# Altium PCB Image.PcbDoc
Units mil, origin at the board's own origin, x right, y up, seen from the top; angles counter-clockwise.
Board outline 1003.94 x 1003.94 mil, 6 copper layers (1 Top (Sig/Pwr), 2 (GND), 3 (Sig/Pwr), 4 (GND/Sig), 5 (GND), 6 Bottom (Sig/Pwr)), stack 68.504 mil thick; 53 components, 39 nets, 220 pads, 88 vias.
Unrouted connection lines stored in the file: 294.
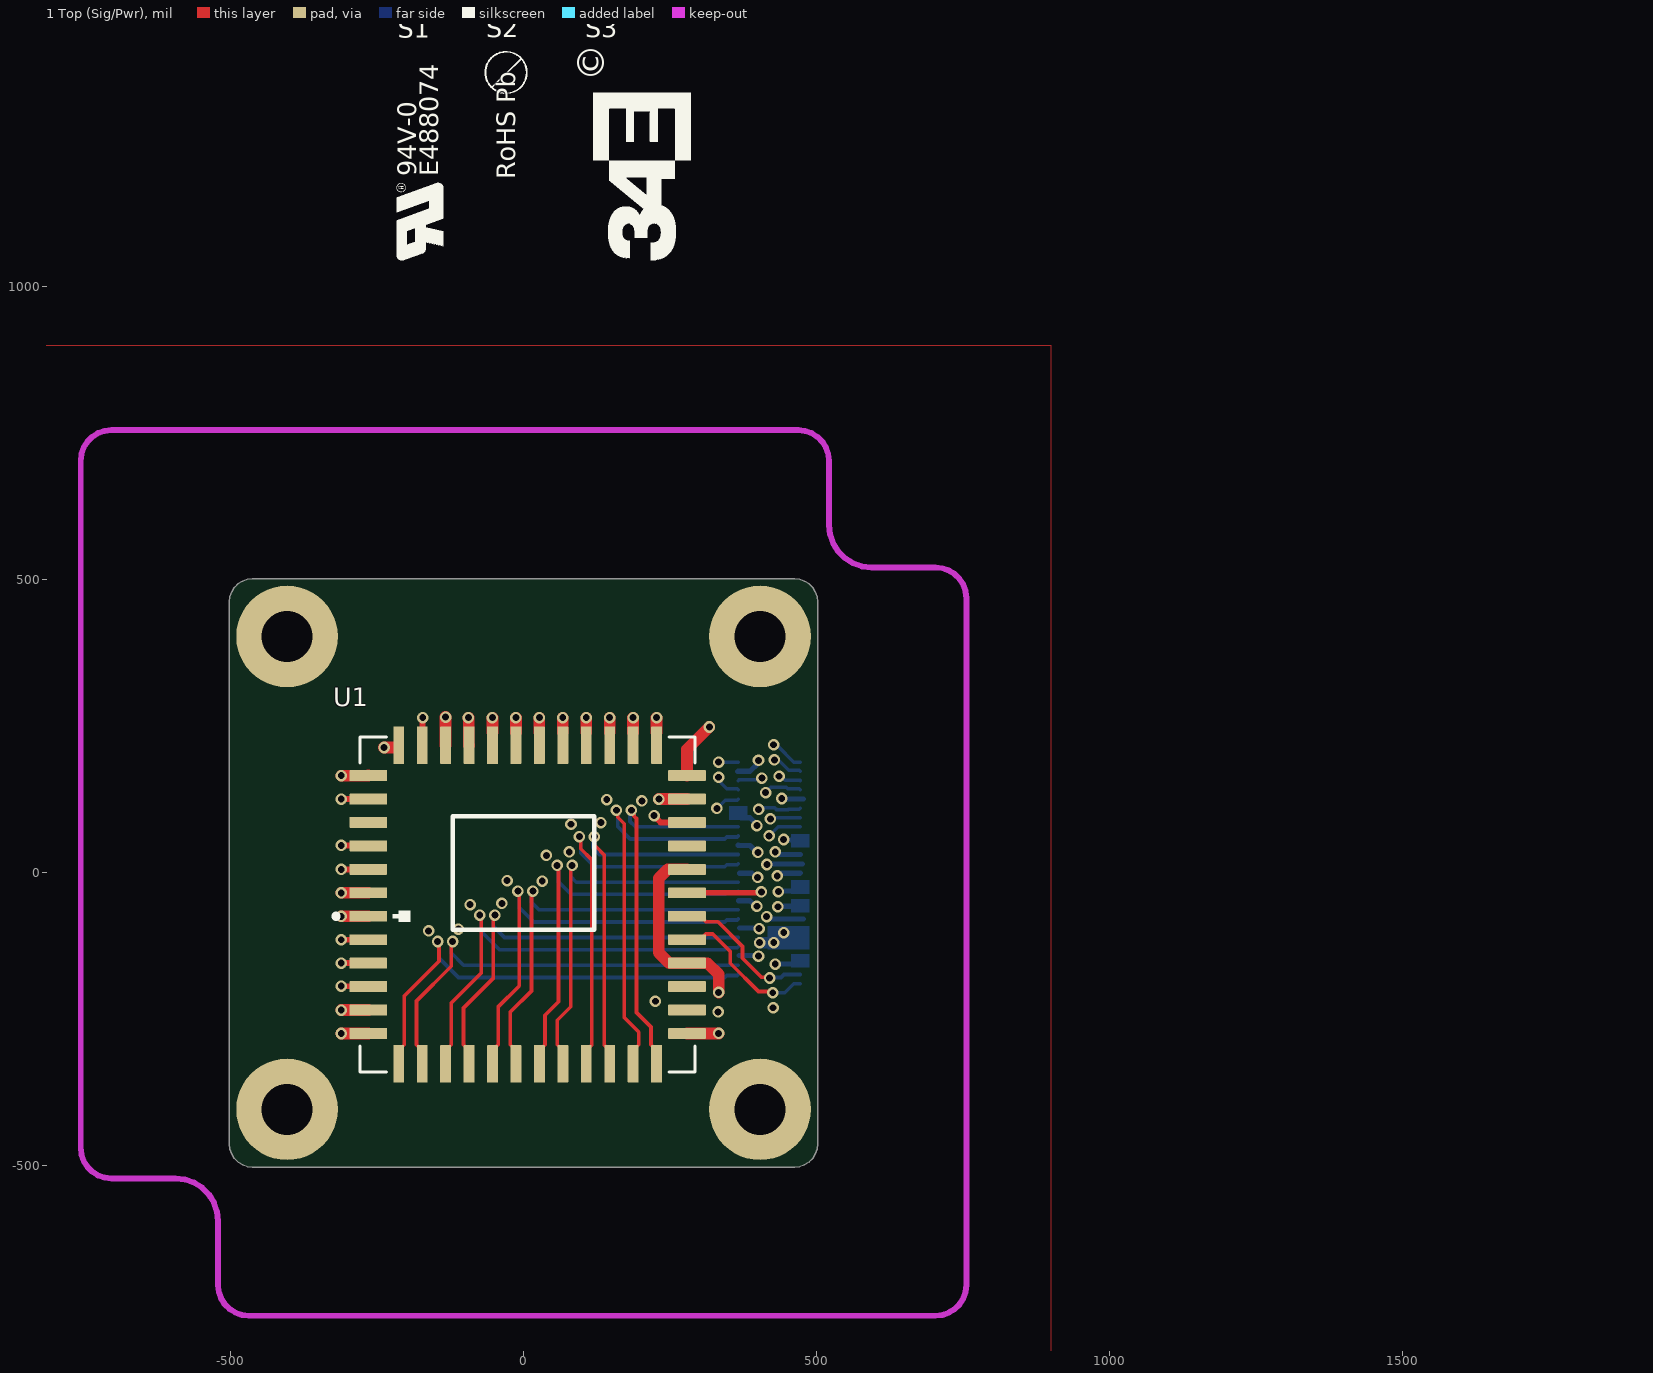
[diagram p0: 1 Top (Sig/Pwr) view]
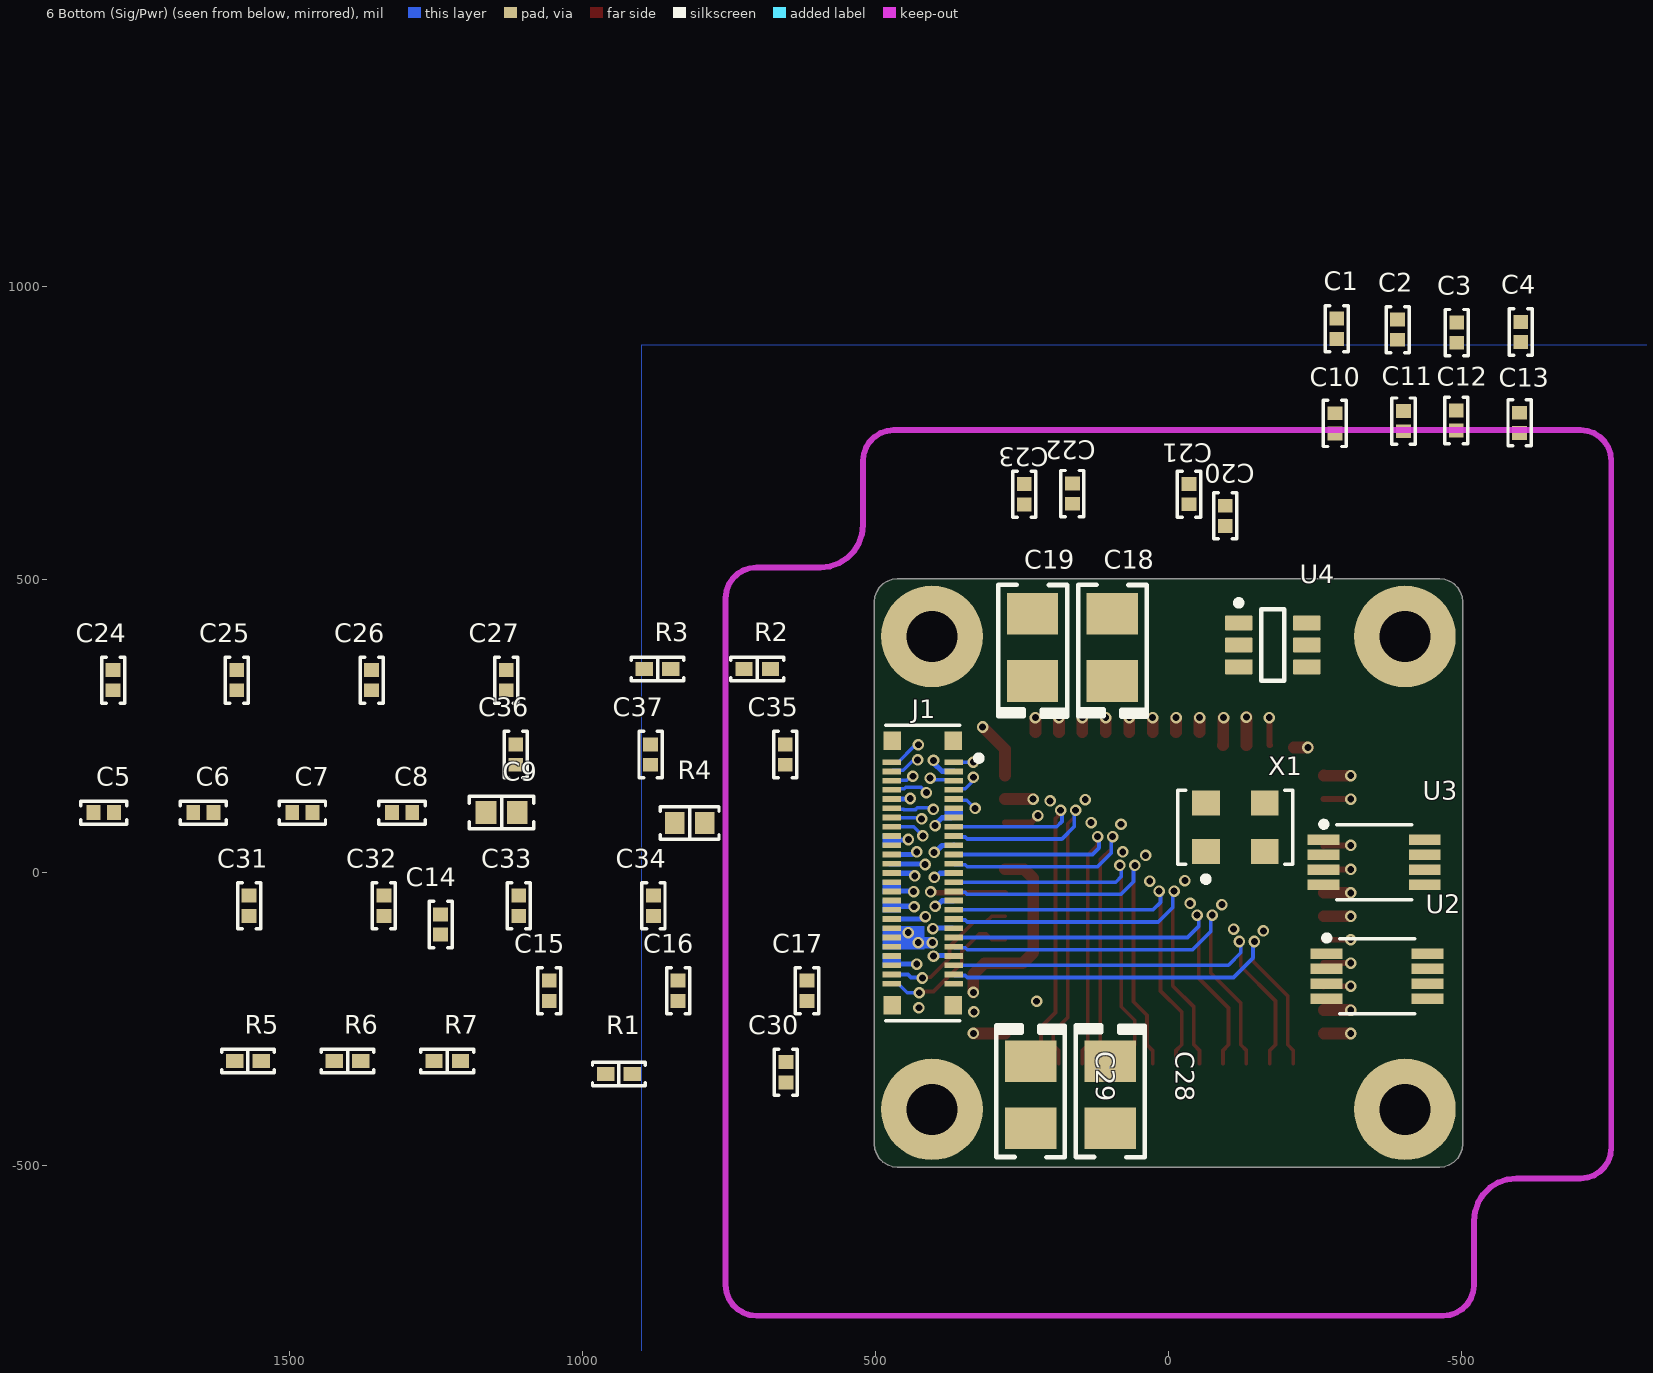
[diagram p1: 6 Bottom (Sig/Pwr) view, seen from below]
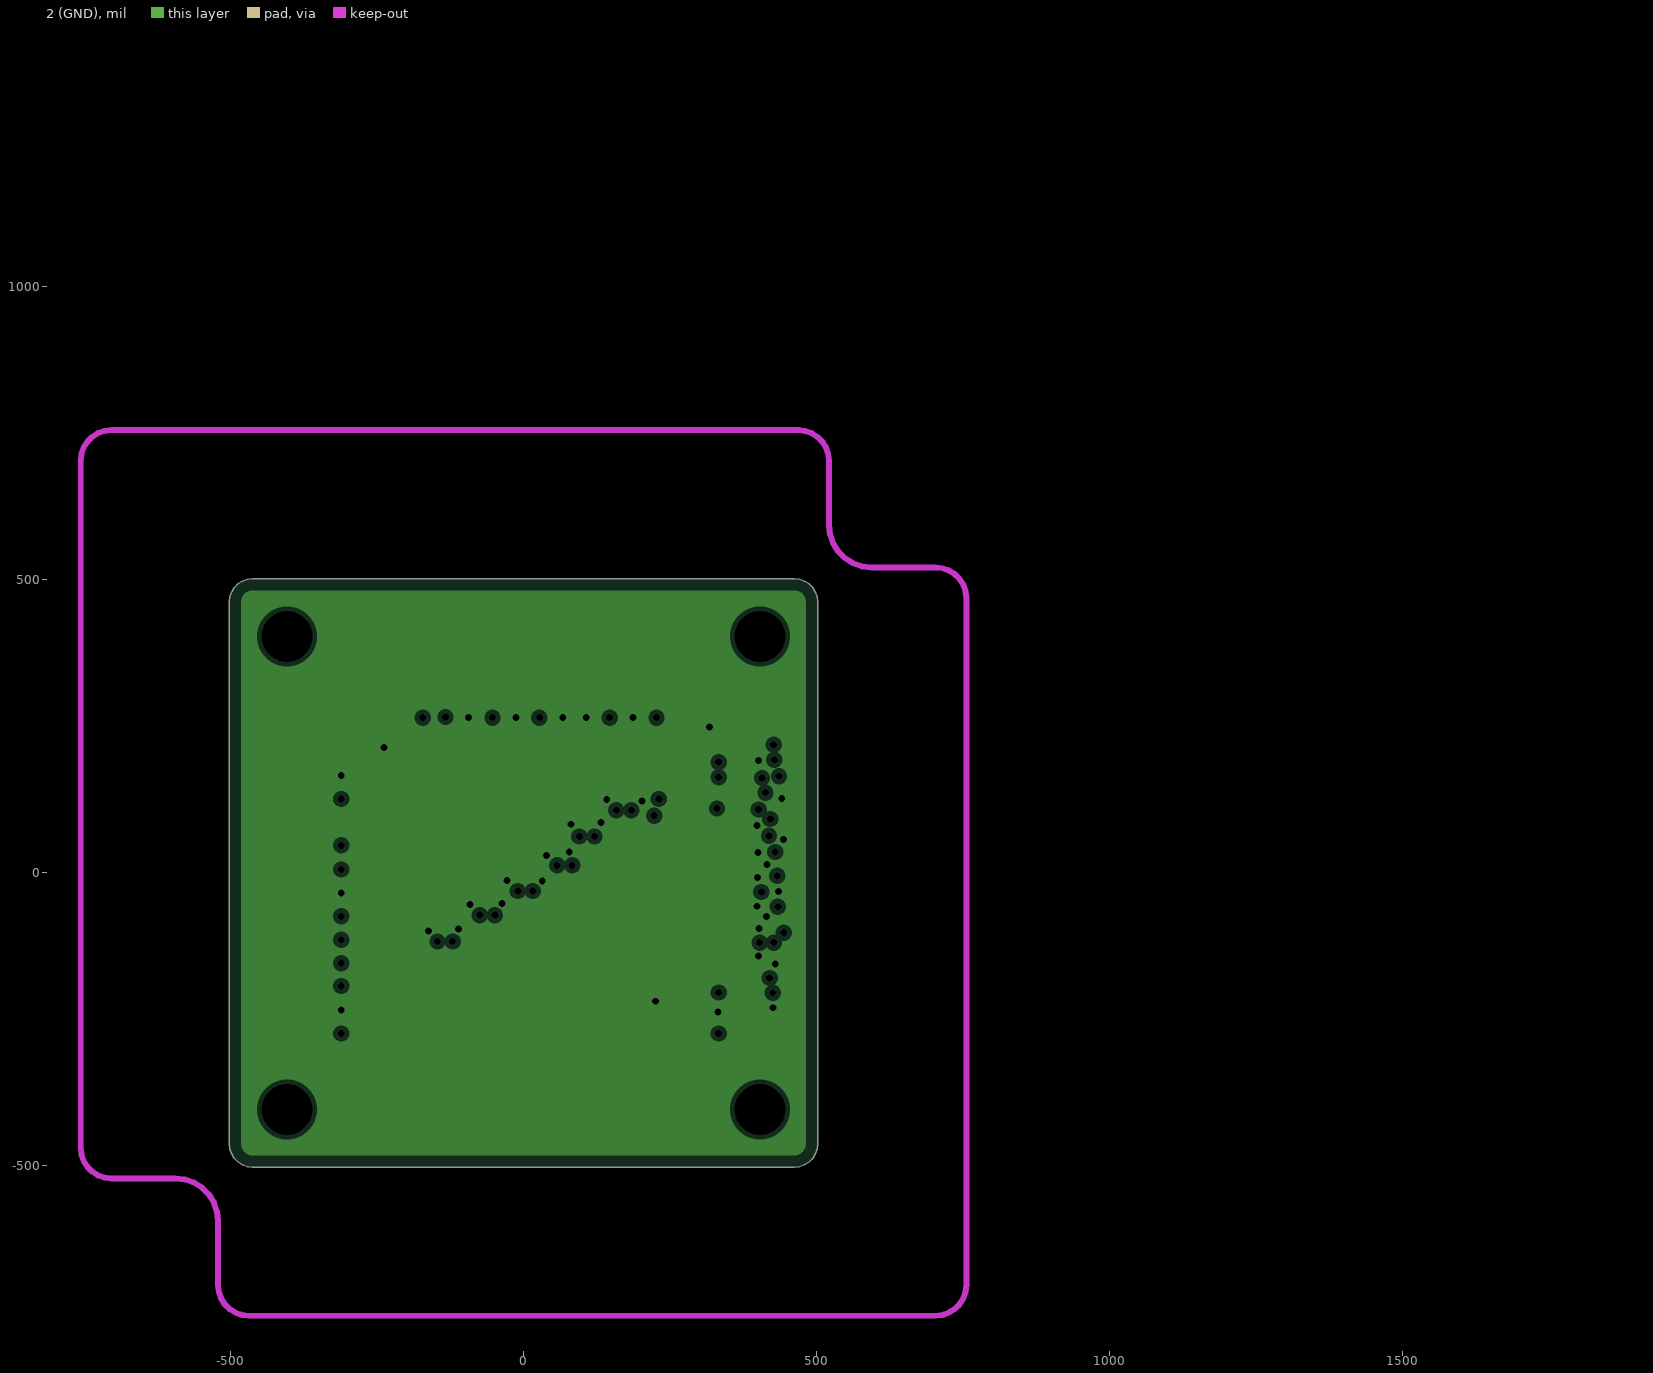
[diagram p2: 2 (GND), clearances drawn from the general rule]
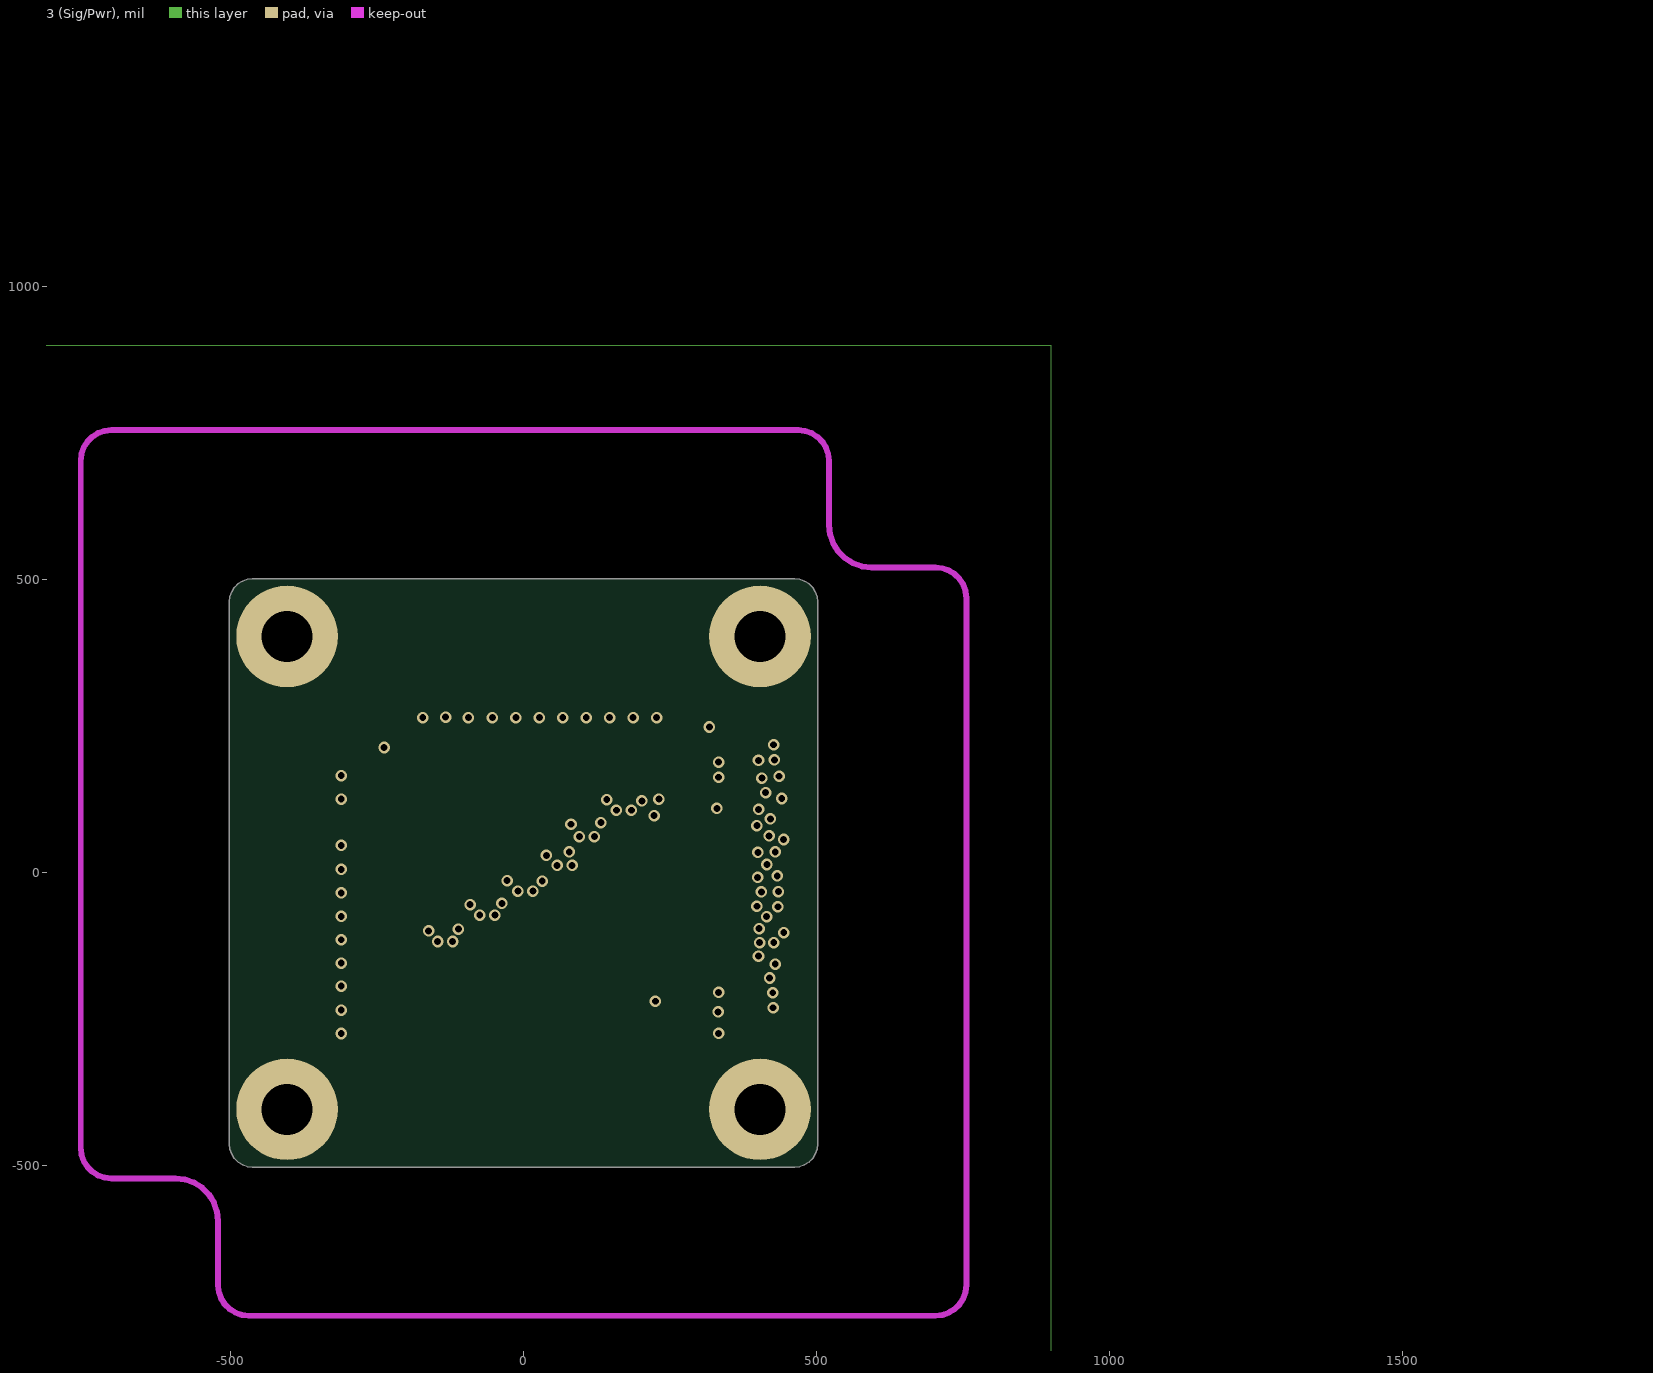
[diagram p3: 3 (Sig/Pwr)]
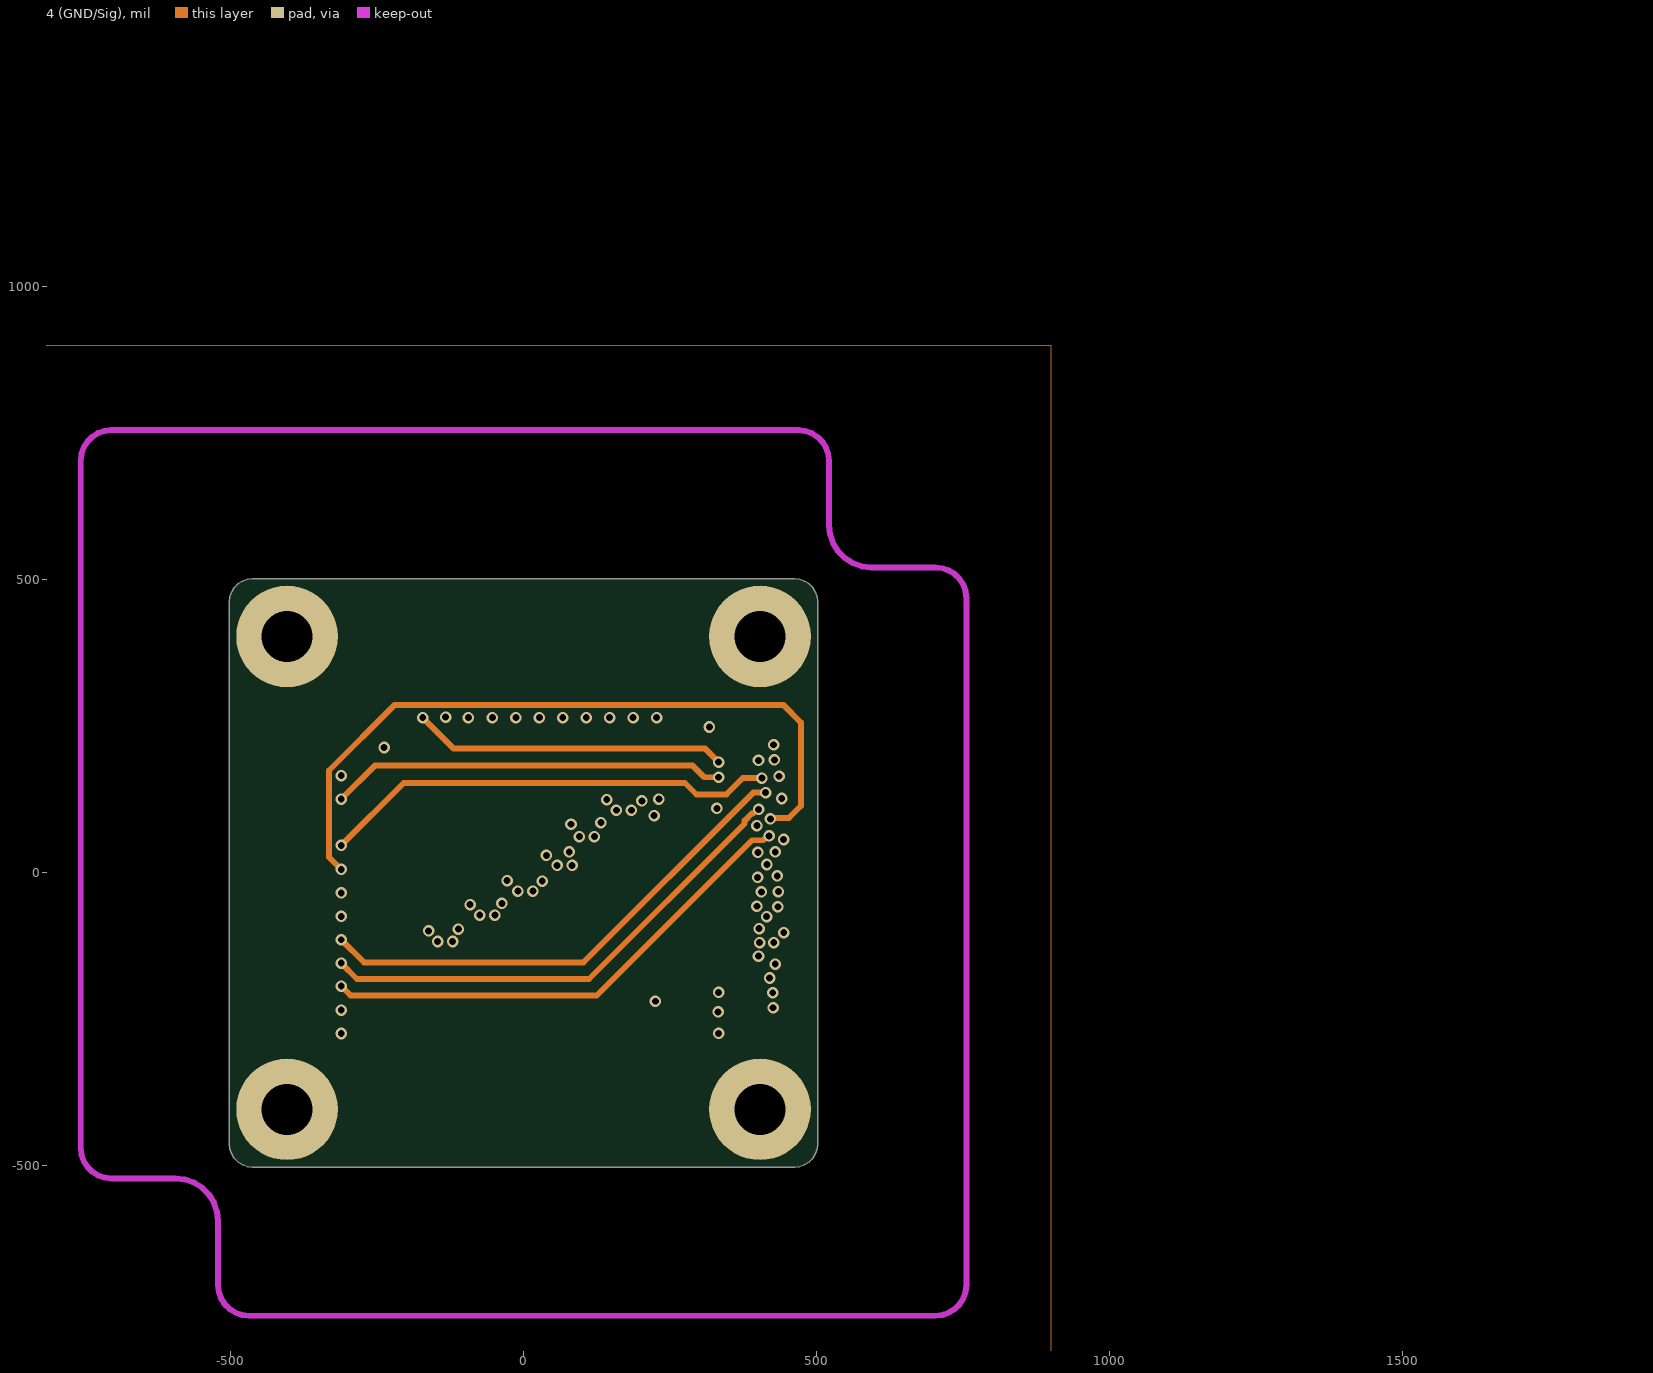
[diagram p4: 4 (GND/Sig)]
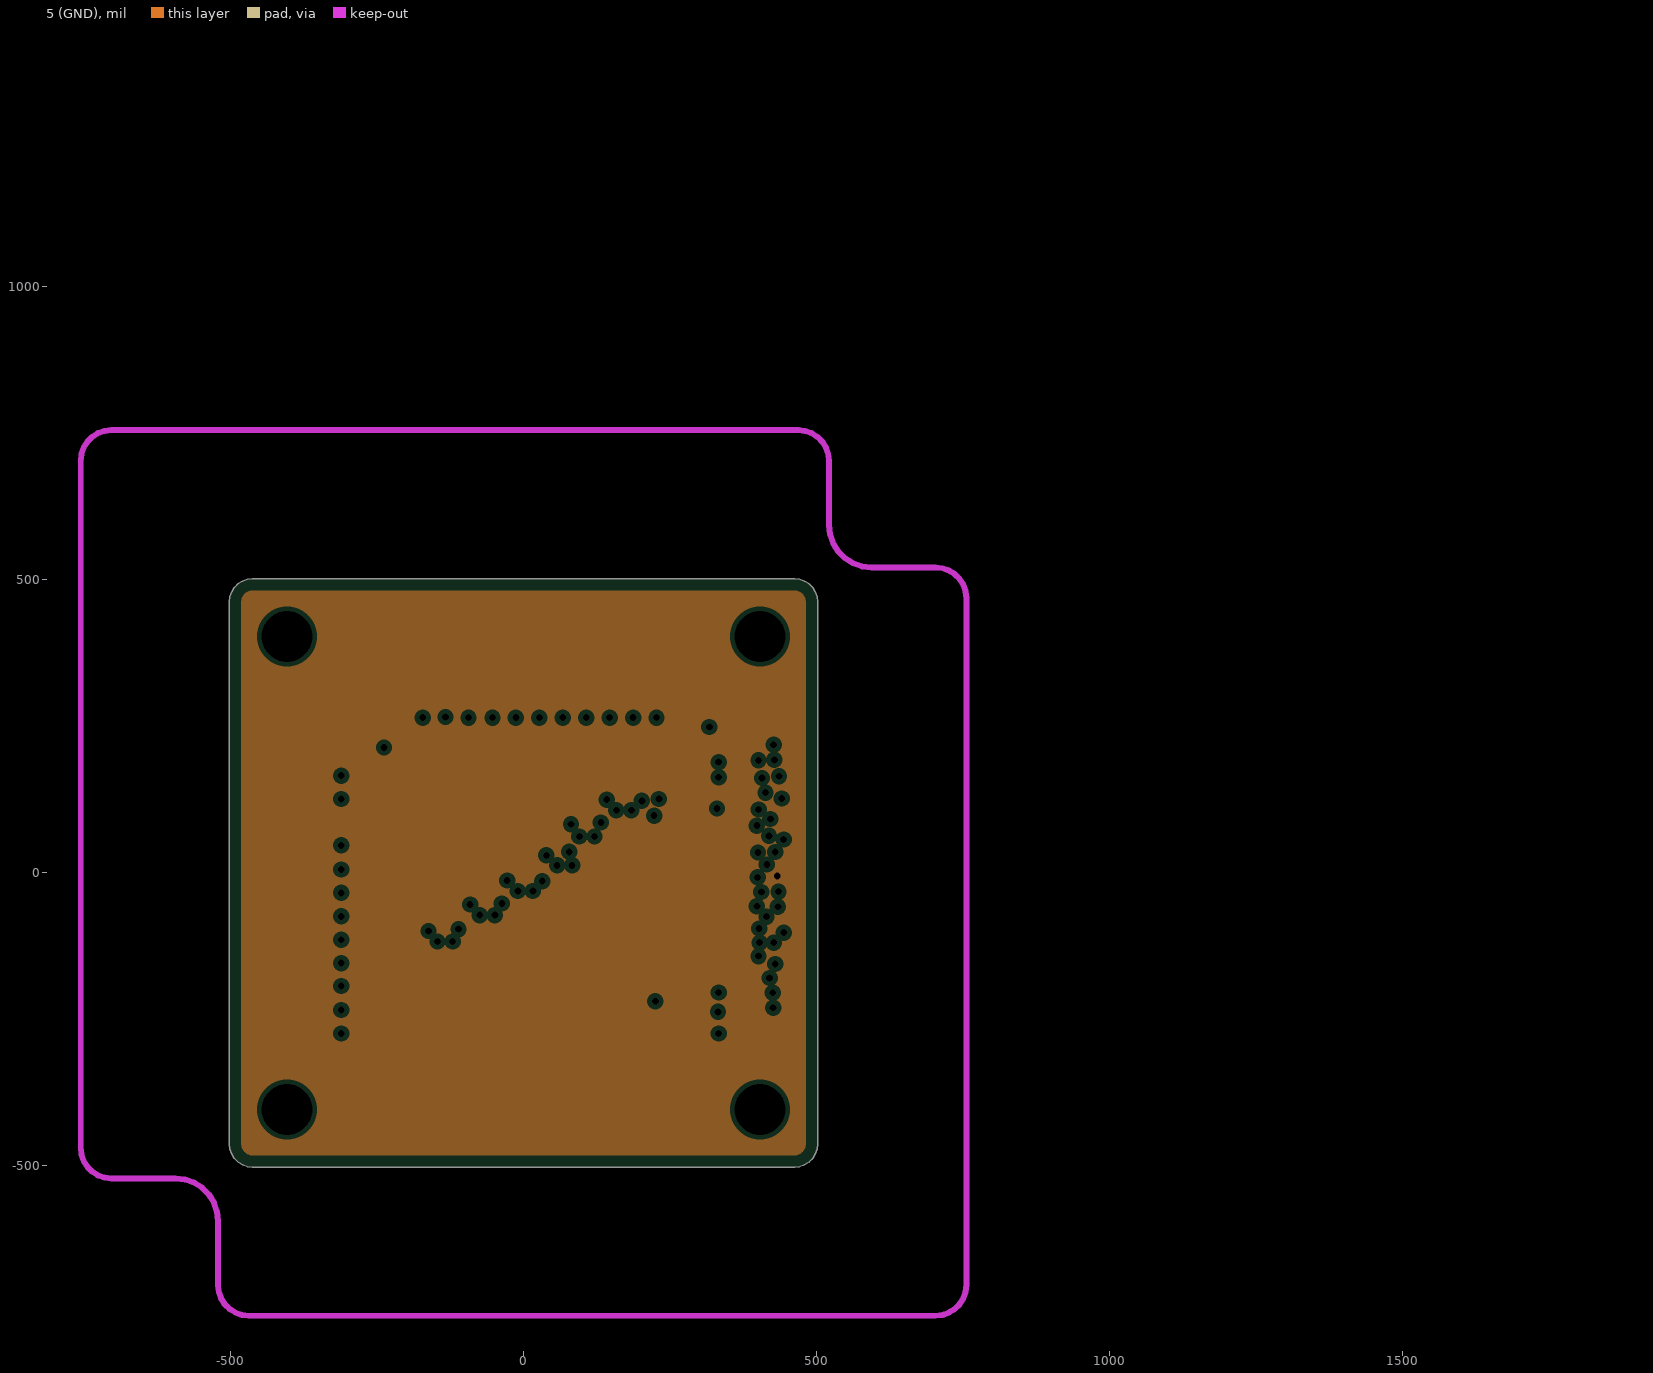
[diagram p5: 5 (GND), clearances drawn from the general rule]

## Layer stack, top to bottom
Top Solder: solder mask 1, SM-001, Dk 4
1 Top (Sig/Pwr): signal copper 1.378
Dielectric 1: prepreg 4.3307, PP-015, Dk 4.29
2 (GND): plane copper 1.378, net GND
Dielectric 2: core 23.622, Core-038, Dk 4.6
3 (Sig/Pwr): signal copper 1.378
Dielectric 3: prepreg 4.3307, PP-015, Dk 4.29
4 (GND/Sig): signal copper 1.378
Dielectric 4: core 23.622, Core-038, Dk 4.6
5 (GND): plane copper 1.378, net +3.3
Dielectric 5: prepreg 4.3307, PP-015, Dk 4.29
6 Bottom (Sig/Pwr): signal copper 1.378
Bottom Solder: solder mask 1, SM-001, Dk 4

## Board outline
462.6,-501.97 471.36,-500.98 479.68,-498.07 487.15,-493.38 493.38,-487.15 498.07,-479.68 500.98,-471.36 501.97,-462.6 501.97,462.6 500.98,471.36 498.07,479.68 493.38,487.15 487.15,493.38 479.68,498.07 471.36,500.98 462.6,501.97 -462.6,501.97 -471.36,500.98 -479.68,498.07 -487.15,493.38 -493.38,487.15 -498.07,479.68 -500.98,471.36 -501.97,462.6 -501.97,-462.6 -500.98,-471.36 -498.07,-479.68 -493.38,-487.15 -487.15,-493.38 -479.68,-498.07 -471.36,-500.98 -462.6,-501.97

## Design rules (kind name [scope] priority, off if disabled: settings)
BoardOutlineClearance BoardOutlineClearance_Polygon [IsPolygon] p1: gap=9.84 ignorepadtopadclearanceinfootprint=FALSE
Clearance [All] p1: gap=6 ignorepadtopadclearanceinfootprint=TRUE except(10: SMDPad-SMDPad)
DiffPairsRouting DiffPairsRouting_CAM [Not InDifferentialPair('USB')] p1: maxlimit=15.75 minlimit=5 mostfreqgap=14.58 toplayer_mingap=6 toplayer_minwidth=4 toplayer_maxwidth=6.3 toplayer_prefwidth=6 bottomlayer_mingap=6 bottomlayer_minwidth=4 bottomlayer_maxwidth=6.3 bottomlayer_prefwidth=6 impedanceprofiledriven=TRUE impedanceprofileid={367E0956-4617-40D2-A523-51326FB4A553} impedanceprofilevalue=100.000000 maxuncoupledlength=500
FanoutControl Fanout_BGA [IsBGA] p1: bgadir=NE bgaviamode=Centered fanoutstyle=BGA fanoutdirection=Alternating viagrid=1 // Fanout_BGA (Default Rule)
HoleSize [All] p1: absolutevalues=TRUE maxlimit=10000 minlimit=11.81 maxpercent=80.000 minpercent=20.000
HoleToHoleClearance HoleToHoleClearance_Via [IsVia] p1: gap=11 allowstackedmicrovias=TRUE
HoleToHoleClearance [Not IsVia] p2: gap=16 allowstackedmicrovias=TRUE
MinimumSolderMaskSliver [All] p1: minsoldermaskwidth=4
NetAntennae [Not InNet('ENC')] p1: netantennaetolerance=0
PlaneClearance [All] p1: clearance=8
PlaneConnect PlaneConnect_Thru [IsThruPin] p1: planeconnectstyle=Relief reliefexpansion=10 reliefentries=4 reliefconductorwidth=20 reliefairgap=10
PlaneConnect [All] p2: planeconnectstyle=Direct reliefexpansion=20 reliefentries=4 reliefconductorwidth=10 reliefairgap=10
PolygonConnect PolygonConnect_Thru [IsThruPin] p1: connectstyle=Relief reliefconductorwidth=20 reliefentries=4 polygonreliefangle="45 Angle" airgapwidth=10
PolygonConnect [All] p2: connectstyle=Direct reliefconductorwidth=10 reliefentries=4 polygonreliefangle="90 Angle" airgapwidth=10
RoutingVias [All] p1: holewidth=11.81 width=23.62 viastyle="Through Hole" minholewidth=5.91 minwidth=11.81 maxholewidth=39.37 maxwidth=78.74
SignalStimulus "Schematic Signal Stimulus_12" [InDifferentialPairClass('CAM_DOUT0')] p1: kind=1 level=1 starttime=0.000 stoptime=1.389n periodtime=2.778n
SignalStimulus "Schematic Signal Stimulus_11" [InDifferentialPairClass('CAM_CLKIN')] p2: kind=1 level=1 starttime=0.000 stoptime=1.389n periodtime=2.778n
SignalStimulus "Schematic Signal Stimulus_10" [InDifferentialPairClass('CAM_CLKOUT')] p3: kind=1 level=1 starttime=0.000 stoptime=1.389n periodtime=2.778n
SignalStimulus "Schematic Signal Stimulus_9" [InDifferentialPairClass('CAM_DOUT1')] p4: kind=1 level=1 starttime=0.000 stoptime=1.389n periodtime=2.778n
SignalStimulus "Schematic Signal Stimulus_8" [InDifferentialPairClass('CAM_SYNC')] p5: kind=1 level=1 starttime=0.000 stoptime=1.389n periodtime=2.778n
SignalStimulus "Schematic Signal Stimulus_7" [InDifferentialPairClass('CAM_DOUT2')] p6: kind=1 level=1 starttime=0.000 stoptime=1.389n periodtime=2.778n
SignalStimulus "Schematic Signal Stimulus_6" [InDifferentialPairClass('CAM_DOUT3')] p7: kind=1 level=1 starttime=0.000 stoptime=1.389n periodtime=2.778n
SilkToSilkClearance [All] p1: silktosilkclearance=0
SilkToSolderMaskClearance [IsPad] p1: minsilkscreentomaskgap=6 clearancetoexposedcopper=TRUE
SolderMaskExpansion SolderMaskExpansion_Via [Isvia] p1: expansion=2 istentingtop=TRUE
SolderMaskExpansion [Not Isvia] p2: expansion=2 istentingtop=FALSE
UnRoutedNet [Not InNet('ENC')] p1:
Width [All] p1: maxlimit=100 minlimit=6 preferedwidth=10
19 further rules are at their usual default settings.

## Classes and differential pairs
differential pair class CAM_CLKOUT: CAM_CLKOUT
differential pair class CAM_CLKIN: CAM_CLKIN
component class Image: C1 C2 C3 C4 C5 C6 C7 C8 C9 C10 C11 C12 C14 C16 C18 C19 C20 C24 C30 C32 C34 C35 C36 C37 J1 R2 R6 R7 S1 S2 S3 U1 U2 U3 U4 X1
differential pair class CAM_SYNC: CAM_SYNC
differential pair class CAM_DOUT3: CAM_DOUT3
differential pair class CAM_DOUT2: CAM_DOUT2
differential pair class CAM_DOUT1: CAM_DOUT1
differential pair class CAM_DOUT0: CAM_DOUT0
differential pair CAM_CLKOUT: +CAM_CLKOUT_P -CAM_CLKOUT_N
differential pair CAM_CLKIN: +CAM_CLKIN_P -CAM_CLKIN_N
differential pair CAM_SYNC: +CAM_SYNC_P -CAM_SYNC_N
differential pair CAM_DOUT3: +CAM_DOUT3_P -CAM_DOUT3_N
differential pair CAM_DOUT2: +CAM_DOUT2_P -CAM_DOUT2_N
differential pair CAM_DOUT1: +CAM_DOUT1_P -CAM_DOUT1_N
differential pair CAM_DOUT0: +CAM_DOUT0_P -CAM_DOUT0_N

## Components (designator, comment, footprint, x,y, rotation, side; value= is the part's Value field where it differs from the comment)
C1 "0.1µF" "CAP 0402_1005" -287,928.68 r90 bottom
C2 "0.1µF" "CAP 0402_1005" -391,927 r90 bottom
C3 "0.1µF" "CAP 0402_1005" -492,922 r90 bottom
C4 "0.1µF" "CAP 0402_1005" -601,923 r90 bottom
C5 "4.7µF" "CAP 0402_1005" 1816.81,103 r180 bottom
C6 "4.7µF" "CAP 0402_1005" 1646.81,103 r180 bottom
C7 "4.7µF" "CAP 0402_1005" 1477.81,103 r180 bottom
C8 "4.7µF" "CAP 0402_1005" 1307.81,103 r180 bottom
C9 "10µF" "CAP 0603_1608" 1137.81,103 r180 bottom
C10 "1µF" "CAP 0402_1005" -284,767 r90 bottom
C11 "1µF" "CAP 0402_1005" -401,771 r90 bottom
C12 "1µF" "CAP 0402_1005" -491,772 r90 bottom
C13 "1µF" "CAP 0402_1005" -599,768 r90 bottom
C14 "4.7µF" "CAP 0402_1005" 1242,-88 r90 bottom
C15 "4.7µF" "CAP 0402_1005" 1056.81,-201 r90 bottom
C16 "4.7µF" "CAP 0402_1005" 836.81,-201 r90 bottom
C17 "4.7µF" "CAP 0402_1005" 616.81,-201 r90 bottom
C18 "100µF" "CAP POL 1411_3528" 96,385 r90 bottom
C19 "100µF" "CAP POL 1411_3528" 232,385 r90 bottom
C20 "1µF" "CAP 0402_1005" -97,609.32 r270 bottom
C21 "1µF" "CAP 0402_1005" -35,646.32 r270 bottom
C22 "1µF" "CAP 0402_1005" 164,647.32 r270 bottom
C23 "1µF" "CAP 0402_1005" 245.92,646.11 r270 bottom
C24 "4.7µF" "CAP 0402_1005" 1800.81,329 r90 bottom
C25 "4.7µF" "CAP 0402_1005" 1589.81,329 r90 bottom
C26 "4.7µF" "CAP 0402_1005" 1359.81,329 r90 bottom
C27 "4.7µF" "CAP 0402_1005" 1129.81,329 r90 bottom
C28 "100µF" "CAP POL 1411_3528" 99,-378.48 r270 bottom
C29 "100µF" "CAP POL 1411_3528" 235,-378.52 r270 bottom
C30 "10nF" "CAP 0402_1005" 652.81,-340 r90 bottom value="10000 pF"
C31 "10µF" "CAP 0402_1005" 1568.81,-56 r90 bottom
C32 "10µF" "CAP 0402_1005" 1338.81,-56 r90 bottom
C33 "10µF" "CAP 0402_1005" 1108.81,-56 r90 bottom
C34 "10µF" "CAP 0402_1005" 878.81,-56 r90 bottom
C35 "0.1µF" "CAP 0402_1005" 653.81,202 r90 bottom
C36 "10nF" "CAP 0402_1005" 1113.81,202 r90 bottom value="10000 pF"
C37 "10nF" "CAP 0402_1005" 883.81,202 r90 bottom value="10000 pF"
J1 "2049270501" 2049270501 419.29,0 r0 top locked
R1 "100" "RES 0402_1005" 937.81,-343 r180 bottom
R2 "10k" "RES 0402_1005" 701.81,348 r180 bottom value="10 kOhms"
R3 "47k 1%" "RES 0402_1005" 871.81,348 r180 bottom value="47 kOhms"
R4 "0" "RES 0603_1608" 817,85 r180 bottom
R5 "100k" "RES 0402_1005" 1570.81,-321 r180 bottom value="100 kOhms"
R6 "100k" "RES 0402_1005" 1400.81,-321 r180 bottom value="100 kOhms"
R7 "100k" "RES 0402_1005" 1230.81,-321 r180 bottom value="100 kOhms"
S1 "" UL -179.81,1186 r90 top
S2 "" RoHS -29.81,1289 r90 top
S3 "" 34EngineeringLogo 298.19,1032 r90 top
U1 "NOIP1FN0300A-QDI" NOIP1FN0300A-QDI 7.09,-53.94 r90 top locked
U2 "NCP3335ADM330R2G" NCP3335ADM330R2G -356,-176 r180 bottom
U3 "NCP3335ADM330R2G" NCP3335ADM330R2G -351,18 r180 bottom
U4 "LM3880MF-1AB/NOPB" DBV0006A_M -177.93,389 r180 bottom
X1 "ASFLMB-72.000MHZ-XY-T" ASFLMB-72.000MHZ-XY-T -114,78 r180 bottom

## Footprints (in the part's own frame and the unit in brackets; to place one, negate y for a bottom-side part, rotate by r counter-clockwise, add the part's x,y. Pads: shape width x height; smd on the part's side, far side on the other; paste and mask are expansions set on the pad)
34EngineeringLogo [mil]
  silkscreen extent 13,13 299,179
2049270501 [mm]
  rect 0.81x0.25 smd far side paste+0 mask+0: 1(-1.345,4.8) 2(-1.345,4.4) 3(-1.345,4) 4(-1.345,3.6) 5(-1.345,3.2) 6(-1.345,2.8) 7(-1.345,2.4) 8(-1.345,2) 9(-1.345,1.6) 10(-1.345,1.2) 11(-1.345,0.8) 12(-1.345,0.4) 13(-1.345,0) 14(-1.345,-0.4) 15(-1.345,-0.8) 16(-1.345,-1.2) 17(-1.345,-1.6) 18(-1.345,-2) 19(-1.345,-2.4) 20(-1.345,-2.8) 21(-1.345,-3.2) 22(-1.345,-3.6) 23(-1.345,-4) 24(-1.345,-4.4) 25(-1.345,-4.8) 26(1.345,-4.8) 27(1.345,-4.4) 28(1.345,-4) 29(1.345,-3.6) 30(1.345,-3.2) 31(1.345,-2.8) 32(1.345,-2.4) 33(1.345,-2) 34(1.345,-1.6) 35(1.345,-1.2) 36(1.345,-0.8) 37(1.345,-0.4) 38(1.345,0) 39(1.345,0.4) 40(1.345,0.8) 41(1.345,1.2) 42(1.345,1.6) 43(1.345,2) 44(1.345,2.4) 45(1.345,2.8) 46(1.345,3.2) 47(1.345,3.6) 48(1.345,4) 49(1.345,4.4) 50(1.345,4.8)
  rect 0.77x0.8 smd far side paste+0 mask+0: MNT(-1.325,-5.73) MNT(-1.325,5.73) MNT(1.325,-5.73) MNT(1.325,5.73)
  body extent -1.59,-6.41 1.59,6.41
ASFLMB-72.000MHZ-XY-T [mm]
  rect 1.2x1.1 smd: 1(-1.27,-1.05) 2(1.27,-1.05) 3(1.27,1.05) 4(-1.27,1.05)
  silkscreen extent -2.5,-2.37 2.5,1.6, body extent -2.5,-1.6 2.5,1.6, height 0.84
"CAP 0402_1005" [mm] "Chip Capacitor, 2-Leads, Body 1.02x0.51mm, IPC Medium Density"
  rect 0.6x0.64 smd: 1(-0.44,0) 2(0.44,0)
  silkscreen extent -1,-0.5 1,0.5, body extent -0.5,-0.26 0.5,0.26, height 0.52
"CAP 0603_1608" [mm] "Chip Capacitor, 2-Leads, Body 1.60x0.80mm, IPC Medium Density"
  rect 0.9x1 smd: 1(-0.675,0) 2(0.675,0)
  silkscreen extent -1.4,-0.7 1.4,0.7, body extent -0.8,-0.41 0.8,0.41, height 0.82
"CAP POL 1411_3528" [mm] "Molded Capacitor, 2-Leads, Body 3.50x2.80mm, IPC Medium Density"
  rect 1.8x2.23 smd: 1(-1.46,0) 2(1.46,0)
  silkscreen extent -3,-1.5 2.71,1.48, body extent -1.87,-1.45 1.87,1.45, height 2
DBV0006A_M [mm] "SOT23, 6-Leads, Body 3.05x1.75mm, Pitch 0.95mm, IPC Low Density"
  rrect15% 1.2x0.65 smd: 1(-1.475,0.95) 2(-1.475,0) 3(-1.475,-0.95) 4(1.475,-0.95) 5(1.475,0) 6(1.475,0.95)
  silkscreen extent -1.6,-1.55 0.5,1.95, body extent -1.42,-1.46 1.42,1.46, height 1.11
NCP3335ADM330R2G [mil]
  rect 54.5x18 smd paste+0 mask+0: 1(-86.25,38.39) 2(-86.25,12.8) 3(-86.25,-12.8) 4(-86.25,-38.39) 5(86.25,-38.39) 6(86.25,-12.8) 7(86.25,12.8) 8(86.25,38.39)
  silkscreen extent -90,-64 64,69, body extent -99,-59 99,59, height 43
NOIP1FN0300A-QDI [mm]
  rrect12% 0.47x1.63 smd: 1(-0.508,6.905) 2(-1.524,6.905) 3(-2.54,6.905) 4(-3.556,6.905) 5(-4.572,6.905) 6(-5.588,6.905) 19(-5.588,-6.905) 20(-4.572,-6.905) 21(-3.556,-6.905) 22(-2.54,-6.905) 23(-1.524,-6.905) 24(-0.508,-6.905) 25(0.508,-6.905) 26(1.524,-6.905) 27(2.54,-6.905) 28(3.556,-6.905) 29(4.572,-6.905) 30(5.588,-6.905) 43(5.588,6.905) 44(4.572,6.905) 45(3.556,6.905) 46(2.54,6.905) 47(1.524,6.905) 48(0.508,6.905)
  rrect12% 1.63x0.47 smd: 7(-6.905,5.588) 8(-6.905,4.572) 9(-6.905,3.556) 10(-6.905,2.54) 11(-6.905,1.524) 12(-6.905,0.508) 13(-6.905,-0.508) 14(-6.905,-1.524) 15(-6.905,-2.54) 16(-6.905,-3.556) 17(-6.905,-4.572) 18(-6.905,-5.588) 31(6.905,-5.588) 32(6.905,-4.572) 33(6.905,-3.556) 34(6.905,-2.54) 35(6.905,-1.524) 36(6.905,-0.508) 37(6.905,0.508) 38(6.905,1.524) 39(6.905,2.54) 40(6.905,3.556) 41(6.905,4.572) 42(6.905,5.588)
  silkscreen extent -7.26,-7.26 7.26,8.41, body extent -7.11,-7.11 7.11,7.11, height 2.32
"RES 0402_1005" [mm] "Chip Resistor, 2-Leads, Body 1.0x0.5mm, IPC Medium Density"
  rect 0.75x0.6 smd: 1(-0.575,0) 2(0.575,0)
  silkscreen extent -1.14,-0.51 1.14,0.51, body extent -0.5,-0.25 0.5,0.25, height 0.35
"RES 0603_1608" [mm] "Chip Resistor, 2-Leads, Body 1.60x0.80mm, IPC Medium Density"
  rect 0.85x0.95 smd: 1(-0.65,0) 2(0.65,0)
  silkscreen extent -1.27,-0.7 1.27,0.7, body extent -0.8,-0.4 0.8,0.4, height 0.45
RoHS [mil]
  silkscreen extent 41,-35 112,35
UL [mil]
  silkscreen extent -141,-43 -9,37

## Part data
C1 C2 C3 C4 C35: library part 0402ZC104KAT2A, "CAP CER 0.1UF 10V X7R 0402", Device Package="0402 (1005 Metric)", Manufacturer="AVX Corporation", Operating Temperature="-55°C ~ 125°C", Supplier Part Number 1=478-7891-1-ND, Temperature Coefficient=X7R, Tolerance=±10%, Voltage - Rated=10V, Applications="General Purpose", Capacitance=0.1µF, ComponentLink1Description=Datasheet, ComponentLink1URL=http://datasheets.avx.com/X7RDielectric.pdf, ComponentLink2Description="DigiKey Link", ComponentLink2URL=http://digikey.com/product-detail/en/avx-corporation/0402ZC104KAT2A/478-7891-1-ND/3881514, lastupdated="2/8/2022 12:26:59 PM", Lifecycle Status=Active, Minimum Order=1, Mounting Type="Surface Mount, MLCC", Package / Case="0402 (1005 Metric)", Packaging=TapeAndReel, Part Number=0402ZC104KAT2A, Part Status=Active, partid=1757, price=0.09, Series=-, Size / Dimension="0.039\" L x 0.020\" W (1.00mm x 0.50mm)", Supplier 1=DigiKey, Thickness (Max)="0.022\" (0.55mm)"
C5 C6 C7 C8 C14 C15 C16 C17 C24 C25 C26 C27: library part 04026D475MAT2A, "CAP CER 4.7UF 6.3V X5R 0402", Device Package="0402 (1005 Metric)", Manufacturer="AVX Corporation", Operating Temperature="-55°C ~ 85°C", Supplier Part Number 1=478-10071-1-ND, Temperature Coefficient=X5R, Tolerance=±20%, Voltage - Rated=6.3V, Applications="General Purpose", Capacitance=4.7µF, ComponentLink1Description=Datasheet, ComponentLink1URL=http://datasheets.avx.com/cx5r.pdf, ComponentLink2Description="DigiKey Link", ComponentLink2URL=http://digikey.com/product-detail/en/avx-corporation/04026D475MAT2A/478-10071-1-ND/6564293, lastupdated="2/8/2022 12:26:39 PM", Lifecycle Status=Active, Minimum Order=1, Mounting Type="Surface Mount, MLCC", Package / Case="0402 (1005 Metric)", Packaging=TapeAndReel, Part Number=04026D475MAT2A, Part Status=Active, partid=12333, price=0.04, Series=-, Size / Dimension="0.039\" L x 0.020\" W (1.00mm x 0.50mm)", Supplier 1=DigiKey, Thickness (Max)="0.028\" (0.71mm)"
C9: library part CL10A106MQ8NNNC, "CAP CER 10UF 6.3V X5R 0603", Capacitance="10 µF", Device Package="0603 (1608 Metric)", Manufacturer="Samsung Electro-Mechanics", Operating Temperature="-55°C ~ 85°C", Supplier Part Number 1=1276-1119-1-ND, Temperature Coefficient=X5R, Tolerance=±20%, Voltage - Rated=6.3V, Applications="General Purpose", ComponentLink1Description=Datasheet, ComponentLink1URL=http://www.samsungsem.com/kr/support/product-search/mlcc/CL10A106MQ8NNNC.jsp, ComponentLink2Description="DigiKey Link", ComponentLink2URL=https://www.digikey.com/en/products/detail/samsung-electro-mechanics/CL10A106MQ8NNNC/3886777, lastupdated="7/15/2022 11:29:21 AM", Lifecycle Status=Active, Minimum Order=1, Mounting Type="Surface Mount, MLCC", Package / Case="0603 (1608 Metric)", Packaging=TapeAndReel, Part Number=CL10A106MQ8NNNC, Part Status=Active, partid=39822, price=0.01, Series=CL, Size / Dimension="0.063\" L x 0.031\" W (1.60mm x 0.80mm)", Supplier 1=DigiKey, Thickness (Max)="0.035\" (0.90mm)"
C10 C11 C12 C13 C20 C21 C22 C23: library part C0402C105K9PAC7800, "CAP CER 1UF 6.3V X5R 0402", Capacitance="1 µF", Device Package="0402 (1005 Metric)", Manufacturer=KEMET, Operating Temperature="-55°C ~ 85°C", Supplier Part Number 1=399-C0402C105K9PAC7800CT-ND, Temperature Coefficient=X5R, Tolerance=±10%, Voltage - Rated=6.3V, Applications="Bypass, Decoupling", ComponentLink1Description=Datasheet, ComponentLink1URL=https://api.kemet.com/component-edge/download/datasheet/C0402C105K9PACTU.pdf, ComponentLink2Description="DigiKey Link", ComponentLink2URL=https://www.digikey.com/en/products/detail/kemet/C0402C105K9PAC7800/1090778, lastupdated="7/15/2022 11:25:08 AM", Lifecycle Status=Active, Minimum Order=1, Mounting Type="Surface Mount, MLCC", Package / Case="0402 (1005 Metric)", Packaging=CutTape, Part Number=C0402C105K9PAC7800, Part Status=Active, partid=33394, price=0.01, Series="SMD Comm X5R", Size / Dimension="0.039\" L x 0.020\" W (1.00mm x 0.50mm)", Supplier 1=DigiKey, Thickness (Max)="0.022\" (0.55mm)"
C18 C19 C28 C29: library part TPSB107M010R0400, "CAP TANT 100UF 20% 10V 1411", ESR (Equivalent Series Resistance)=400mOhm, Manufacturer="AVX Corporation", Manufacturer Size Code=B, Operating Temperature="-55°C ~ 125°C", Package / Case="1411 (3528 Metric), 1210", Supplier Part Number 1=478-5231-1-ND, Tolerance=±20%, Voltage - Rated=10V, Capacitance=100µF, ComponentLink1Description=Datasheet, ComponentLink1URL=http://datasheets.avx.com/TPS.pdf, ComponentLink2Description="DigiKey Link", ComponentLink2URL=http://digikey.com/product-detail/en/avx-corporation/TPSB107M010R0400/478-5231-1-ND/1913301, Features="General Purpose", Height - Seated (Max)="0.083\" (2.10mm)", lastupdated="9/2/2020 1:15:46 AM", Lifecycle Status=Active, Minimum Order=1, Mounting Type="Surface Mount", Packaging=TapeAndReel, Part Number=TPSB107M010R0400, Part Status=Active, partid=84, price=0.31, Series=TPS, Size / Dimension="0.138\" L x 0.110\" W (3.50mm x 2.80mm)", Supplier 1=DigiKey, Type=Molded
C30 C36 C37: library part 0402B103K6R3CT, "CAP CER 10000PF 6.3V X7R 0402", Capacitance="10000 pF", Device Package="0402 (1005 Metric)", Manufacturer="Walsin Technology Corporation", Operating Temperature="-55°C ~ 125°C", Supplier Part Number 1=1292-1173-1-ND, Temperature Coefficient=X7R, Tolerance=±10%, Voltage - Rated=6.3V, Applications="General Purpose", ComponentLink1Description=Datasheet, ComponentLink1URL=http://www.passivecomponent.com/wp-content/uploads/2018/10/MLCC.pdf, ComponentLink2Description="DigiKey Link", ComponentLink2URL=https://www.digikey.com/en/products/detail/walsin-technology-corporation/0402B103K6R3CT/9354671, lastupdated="7/10/2022 8:59:10 AM", Lifecycle Status=Active, Minimum Order=1, Mounting Type="Surface Mount, MLCC", Package / Case="0402 (1005 Metric)", Packaging=CutTape, Part Number=0402B103K6R3CT, Part Status=Active, partid=11629, price=0.01, Series=-, Size / Dimension="0.039\" L x 0.020\" W (1.00mm x 0.50mm)", Supplier 1=DigiKey, Thickness (Max)="0.022\" (0.55mm)"
C31 C32 C33 C34: library part 0402ZD106MAT2A, "CAP CER 10UF 10V X5R 0402", Device Package="0402 (1005 Metric)", Manufacturer="AVX Corporation", Operating Temperature="-55°C ~ 85°C", Supplier Part Number 1=478-10052-1-ND, Temperature Coefficient=X5R, Tolerance=±20%, Voltage - Rated=10V, Applications="General Purpose", Capacitance=10µF, ComponentLink1Description=Datasheet, ComponentLink1URL=http://datasheets.avx.com/cx5r.pdf, ComponentLink2Description="DigiKey Link", ComponentLink2URL=http://digikey.com/product-detail/en/avx-corporation/0402ZD106MAT2A/478-10052-1-ND/6564275, lastupdated="2/8/2022 12:26:50 PM", Lifecycle Status=Active, Minimum Order=1, Mounting Type="Surface Mount, MLCC", Package / Case="0402 (1005 Metric)", Packaging=TapeAndReel, Part Number=0402ZD106MAT2A, Part Status=Active, partid=6854, price=0.24, Series=-, Size / Dimension="0.039\" L x 0.020\" W (1.00mm x 0.50mm)", Supplier 1=DigiKey, Thickness (Max)="0.028\" (0.71mm)"
J1: "SlimStack Board-to-Board Receptacle, 0.40mm Pitch, FSB3 Floating Series, 3.00mm Mated Height, 3.20mm Mated Width, 50...", Manufacturer=Molex, Manufacturer Part Number=203955-0503, Supplier Part Number 1=538-204927-0501, Pricing 1="1=3.72000, 10=3.28000, 50=3.28000, 100=2.61000, 1000=2.16000, 10000=2.01000 (USD)", RoHS=No, Stock 1=8587, Supplier 1=Mouser
R1: library part CRG0402F100R, "RES SMD 100 OHM 1% 1/16W 0402", Device Package="0402 (1005 Metric)", Manufacturer="TE Connectivity Passive Product", Operating Temperature="-55°C ~ 155°C", Power (Watts)="0.063W, 1/16W", Resistance="100 Ohms", Supplier Device Package=0402, Supplier Part Number 1=A121527CT-ND, Temperature Coefficient=±100ppm/°C, Tolerance=±1%, ComponentLink1Description=Datasheet, ComponentLink1URL=https://www.te.com/commerce/DocumentDelivery/DDEController?Action=srchrtrv&DocNm=1773204&DocType=DS&DocLang=English, ComponentLink2Description="DigiKey Link", ComponentLink2URL=https://www.digikey.com/en/products/detail/te-connectivity-passive-product/CRG0402F100R/2390484, Composition="Thick Film", Height - Seated (Max)="0.016\" (0.40mm)", lastupdated="7/15/2022 11:42:13 AM", Lifecycle Status=Active, Minimum Order=1, Number of Terminations=2, Package / Case="0402 (1005 Metric)", Packaging=CutTape, Part Number=CRG0402F100R, Part Status=Active, partid=20718, price=0.01, Series="CRG, Neohm", Size / Dimension="0.039\" L x 0.020\" W (1.00mm x 0.50mm)", Supplier 1=DigiKey
R2: library part MCS0402MC1002FE000, "RES SMD 10K OHM 1% 1/10W 0402", Device Package="0402 (1005 Metric)", Manufacturer="Vishay Beyschlag", Operating Temperature="-55°C ~ 175°C", Power (Watts)="0.1W, 1/10W", Ratings=AEC-Q200, Resistance="10 kOhms", Supplier Device Package=0402, Supplier Part Number 1=MCS0402-10.0K-MFCT-ND, Temperature Coefficient=±50ppm/°C, Tolerance=±1%, ComponentLink1Description=Datasheet, ComponentLink1URL=http://www.vishay.com/docs/28760/mcat_pro.pdf, ComponentLink2Description="DigiKey Link", ComponentLink2URL=http://digikey.com/product-detail/en/vishay-beyschlag/MCS0402MC1002FE000/MCS0402-10.0K-MFCT-ND/3883092, Composition="Thin Film", Features="Anti-Sulfur, Automotive AEC-Q200", Height - Seated (Max)="0.015\" (0.37mm)", lastupdated="7/10/2022 9:15:04 AM", Lifecycle Status=Active, Minimum Order=1, Number of Terminations=2, Package / Case="0402 (1005 Metric)", Packaging=TapeAndReel, Part Number=MCS0402MC1002FE000, Part Status=Active, partid=3152, price=0.03, Series="MCS AT - Professional", Size / Dimension="0.039\" L x 0.020\" W (1.00mm x 0.50mm)", Supplier 1=DigiKey
R3: library part RMCF0402FT47K0, "RES 47K OHM 1% 1/16W 0402", Device Package="0402 (1005 Metric)", Manufacturer="Stackpole Electronics Inc", Operating Temperature="-55°C ~ 155°C", Power (Watts)="0.063W, 1/16W", Ratings=AEC-Q200, Resistance="47 kOhms", Supplier Device Package=0402, Supplier Part Number 1=RMCF0402FT47K0CT-ND, Temperature Coefficient=±100ppm/°C, Tolerance=±1%, ComponentLink1Description=Datasheet, ComponentLink1URL=https://www.seielect.com/catalog/sei-rmcf_rmcp.pdf, ComponentLink2Description="DigiKey Link", ComponentLink2URL=https://www.digikey.com/en/products/detail/stackpole-electronics-inc/RMCF0402FT47K0/1714749, Composition="Thick Film", Features="Automotive AEC-Q200", Height - Seated (Max)="0.016\" (0.40mm)", lastupdated="7/10/2022 9:14:59 AM", Lifecycle Status=Active, Minimum Order=1, Number of Terminations=2, Package / Case="0402 (1005 Metric)", Packaging=CutTape, Part Number=RMCF0402FT47K0, Part Status=Active, partid=4957, price=0.01, Series=RMCF, Size / Dimension="0.039\" L x 0.020\" W (1.00mm x 0.50mm)", Supplier 1=DigiKey
R4: library part CRCW06030000Z0EAHP, "RES SMD 0 OHM JUMPER 1/3W 0603", Device Package="0603 (1608 Metric)", Manufacturer="Vishay Dale", Operating Temperature="-55°C ~ 155°C", Power (Watts)="0.333W, 1/3W", Ratings=AEC-Q200, Resistance="0 Ohms", Supplier Device Package=0603, Supplier Part Number 1=541-0.0SBCT-ND, Tolerance=Jumper, ComponentLink1Description=Datasheet, ComponentLink1URL=http://www.vishay.com/docs/20043/crcwhpe3.pdf, ComponentLink2Description="DigiKey Link", ComponentLink2URL=https://www.digikey.com/en/products/detail/vishay-dale/CRCW06030000Z0EAHP/2222231, Composition="Thick Film", Features="Automotive AEC-Q200, Pulse Withstanding", Height - Seated (Max)="0.022\" (0.55mm)", lastupdated="7/15/2022 11:50:24 AM", Lifecycle Status=Active, Minimum Order=1, Number of Terminations=2, Package / Case="0603 (1608 Metric)", Packaging=TapeAndReel, Part Number=CRCW06030000Z0EAHP, Part Status=Active, partid=5474, price=0.01, Series=CRCW-HP, Size / Dimension="0.063\" L x 0.033\" W (1.60mm x 0.85mm)", Supplier 1=DigiKey
R5 R6 R7: library part MCS04020C1003FE000, "RES SMD 100K OHM 1% 1/10W 0402", Device Package="0402 (1005 Metric)", Manufacturer="Vishay Beyschlag", Operating Temperature="-55°C ~ 155°C", Power (Watts)="0.1W, 1/10W", Resistance="100 kOhms", Supplier Device Package=0402, Supplier Part Number 1=MCS0402-100K-CFCT-ND, Temperature Coefficient=±50ppm/°C, Tolerance=±1%, ComponentLink1Description=Datasheet, ComponentLink1URL=http://www.vishay.com/docs/28705/mcx0x0xpro.pdf, ComponentLink2Description="DigiKey Link", ComponentLink2URL=http://digikey.com/product-detail/en/vishay-beyschlag/MCS04020C1003FE000/MCS0402-100K-CFCT-ND/2607930, Composition="Thin Film", Features=Anti-Sulfur, Height - Seated (Max)="0.015\" (0.37mm)", lastupdated="7/10/2022 9:15:04 AM", Lifecycle Status=Active, Minimum Order=1, Number of Terminations=2, Package / Case="0402 (1005 Metric)", Packaging=TapeAndReel, Part Number=MCS04020C1003FE000, Part Status=Active, partid=3149, price=0.03, Series="MCS - Professional", Size / Dimension="0.039\" L x 0.020\" W (1.00mm x 0.50mm)", Supplier 1=DigiKey
S1: library part UL
S2: library part RoHS
S3: library part 34EngineeringLogo, "34 Engineering Silkscreen Logo"
U1: "IC IMAGE SENSOR 0.3MP 48LCC", Case/Package=LCC, Manufacturer="ON Semiconductor", Max Operating Temperature=85°C, Min Operating Temperature=-40°C, Operating Supply Voltage=3.4V, Category=Optoelectronics, ComponentLink1Description=http://www.onsemi.com/pub_link/Collateral/PB_NOIP1SN1300A-D.PDF?src-supplier=Digi-Key, ComponentLink1URL=http://www.onsemi.com/pub_link/Collateral/PB_NOIP1SN1300A-D.PDF?src-supplier=Digi-Key, ComponentLink2Description=http://www.onsemi.com/pub_link/Collateral/NOIP1SN1300A-D.PDF?src-supplier=Avnet+Asia, ComponentLink2URL=http://www.onsemi.com/pub_link/Collateral/NOIP1SN1300A-D.PDF?src-supplier=Avnet+Asia, Lead Free="Lead Free", Manufacturer Part Number=NOIP1FN0300A-QDI, Mount="Surface Mount", Number of Pins=48, Pricing 1="6=58.23675, 8=57.37875, 20=56.62800, 30=55.87725, 60=55.12650, 300=53.83950, 600=53.41050 (USD)", RoHS=Yes, RoHS Compliant=Yes, Supplier 1=Avnet, Supplier Part Number 1=NOIP1FN0300A-QDI
U2 U3: "Linear Voltage Regulator, LDO, Ultra High Accuracy, Low Iq, 500 mA, V out : 3.3 V", Case/Package=MSOP, Dropout Voltage=340mV, Manufacturer="ON Semiconductor", Max Input Voltage=16V, Max Operating Temperature=150°C, Max Output Current=800mA, Min Input Voltage=2.6V, Min Operating Temperature=-40°C, Min Output Voltage=3.3V, Output Voltage Accuracy=0.9%, Package Quantity=4000, Reference Voltage=1.269V, Accuracy=0.9%, Category="Voltage Regulators - Linear", ComponentLink1Description=https://datasheet.ciiva.com/30476/0900766b8124f876-30476966.pdf?src-supplier=RSComponents, ComponentLink1URL=https://datasheet.ciiva.com/30476/0900766b8124f876-30476966.pdf?src-supplier=RSComponents, ComponentLink2Description=https://datasheet.ciiva.com/2061/ncp3335a-d-2061837.pdf?src-supplier=Digi-Key, ComponentLink2URL=https://datasheet.ciiva.com/2061/ncp3335a-d-2061837.pdf?src-supplier=Digi-Key, ComponentLink3Description=https://datasheet.ciiva.com/2061/ncp3335a-d-2061838.pdf?src-supplier=Digi-Key, ComponentLink3URL=https://datasheet.ciiva.com/2061/ncp3335a-d-2061838.pdf?src-supplier=Digi-Key, ComponentLink4Description=https://datasheet.ciiva.com/16390/ncp3335a-d-16390281.pdf?src-supplier=Future+Electronics, ComponentLink4URL=https://datasheet.ciiva.com/16390/ncp3335a-d-16390281.pdf?src-supplier=Future+Electronics, Halogen Free="Halogen Free", Height=0.95mm, Lead Free="Lead Free", Length=3.1mm, Manufacturer Part Number=NCP3335ADM330R2G, Mount="Surface Mount", Number of Outputs=1, Number of Pins=8, Number of Regulators=1, Output Current=800mA, Output Type=Fixed, Output Voltage=3.3V, Packaging="Tape and Reel", Polarity=Positive, Pricing 1="1=1.27050, 10=1.10060, 25=0.93500, 100=0.82150, 250=0.81330, 500=0.66300, 1000=0.61180, 3000=0.57730 (USD)", Radiation Hardening=No, RoHS=Yes, RoHS Compliant=Yes, Stock 1=3509, Supplier 1="Arrow Electronics", Supplier Part Number 1=NCP3335ADM330R2G, Width=3.1mm
U4: library part CMP-0063-01011-4, "Power Sequencer, 6-pin SOT-23, Pb-Free, 1000 Reel", Manufacturer="Texas Instruments", PackageTopMarking=F21A*XTT, PowerWise=N, Code_IPC=SOT26A-6, Code_JEDEC=MO-178-AB, ComponentLink1Description="Datasheet URL", ComponentLink1URL=http://www.ti.com/general/docs/lit/getliterature.tsp?genericPartNumber=LM3880&fileType=pdf, CompType=MiscPower, High-Reliability=Y, PackageDescription="Molded SOT-23, .115 x .063 x .040in Body, 6 Lead, .0375in in Pitch", PackageReference=DBV0006A, PartNumber=LM3880MF-1AB/NOPB, PinCount=6, RoHS=Y
X1: "Silicon Oscillator 72MHz 15pF ±10ppm 4-Pin QFN T/R", Case/Package=SMD/SMT, Frequency=72MHz, Frequency Stability=10ppm, Load Capacitance=15pF, Manufacturer=Abracon, Max Operating Temperature=105°C, Max Supply Current=16mA, Min Operating Temperature=-40°C, Operating Supply Voltage=3.6V, Supplier Part Number 1=815-ASFLMB-72-XY-T, Category=Oscillators, ComponentLink1Description=https://datasheet.ciiva.com/870/memspeedproflyerii-870042.pdf?src-supplier=Digi-Key, ComponentLink1URL=https://datasheet.ciiva.com/870/memspeedproflyerii-870042.pdf?src-supplier=Digi-Key, ComponentLink2Description=https://datasheet.ciiva.com/870/memspeedproflyerii-870043.pdf?src-supplier=Digi-Key, ComponentLink2URL=https://datasheet.ciiva.com/870/memspeedproflyerii-870043.pdf?src-supplier=Digi-Key, ComponentLink3Description=https://datasheet.ciiva.com/870/memspeedproflyerii-870044.pdf?src-supplier=Digi-Key, ComponentLink3URL=https://datasheet.ciiva.com/870/memspeedproflyerii-870044.pdf?src-supplier=Digi-Key, ComponentLink4Description=https://datasheet.ciiva.com/3178/asflmb-3178058.pdf?src-supplier=Avnet, ComponentLink4URL=https://datasheet.ciiva.com/3178/asflmb-3178058.pdf?src-supplier=Avnet, ComponentLink5Description=https://datasheet.ciiva.com/13163/asflmb-24525-13163049.pdf?src-supplier=Mouser, ComponentLink5URL=https://datasheet.ciiva.com/13163/asflmb-24525-13163049.pdf?src-supplier=Mouser, Height=0.035inch, Length=0.197inch, Manufacturer Part Number=ASFLMB-72.000MHZ-XY-T, Mount="Surface Mount", Number of Pins=4, Packaging="Tape and Reel", Pricing 1="1=3.61000, 10=3.45000, 50=3.27000, 100=2.93000, 500=2.76000, 1000=2.40000, 10000=2.40000 (USD)", Radiation Hardening=No, RoHS=Yes, Series="Pure Silicon™ ASFLMB", Stock 1=318, Supplier 1=Mouser, Termination=SMD/SMT, Width=0.126inch

## Free pads (board coordinates)
  round 173.23 hole 86.61: 1(-403.54,-403.54) 1(-403.54,403.54) 1(403.54,-403.54) 1(403.54,403.54)

## Via types
v1: diameter 19.68, hole 11.81, 1 Top (Sig/Pwr) to 6 Bottom (Sig/Pwr), tented both sides, 88 vias

## Nets (pads, with @x,y where several pads share a name; then routed paths per layer and width w, separated by ;. In a path a pad name is that pad's centre, name@x,y a point inside that pad or via, vN(x,y) a via of type N, cw(c..) or ccw(c..) an arc to the next point about the centre after c; other vN are vias at no path point)
1.8V_PG: J1.50 U4.3 | length 57.8
  6 Bottom (Sig/Pwr) w6: v1(426.78,218.66) 429.4,216.04 434.16,216.04 461.22,188.98 J1.50
+1.8: C1.2 C2.2 C3.2 C4.2 C5.2 C6.2 C7.2 C8.2 C9.2 J1.40 U1.6 U1.22 U1.26 | length 420.4
  1 Top (Sig/Pwr) w20: v1(-311,-274) -264.83,-274 U1.6 ; U1.26 246.06,6.06 230.85,-9.15 230.85,-135.85 248.94,-153.94 313.94,-153.94 333,-173 v1(333,-204)
  6 Bottom (Sig/Pwr) w9: v1(429.51,35.76) 432.4,35.76 436.66,31.5 J1.40
+3.3: C30.2 J1.38 R5.2 R6.2 R7.2 X1.4 | length 41.3
  6 Bottom (Sig/Pwr) w9: v1(433,-5) 437.67,-0.33 471.92,-0.33 J1.38
+5: C31.2 C33.2 C35.2 J1.34 J1.35 U2.7 U2.8 U3.7 U3.8 U4.1 | length 34.1
  6 Bottom (Sig/Pwr) w10: v1(433.97,-57.66) 434.87,-56.77 465.23,-56.77 467,-55
+12_CAB: J1.30 J1.31 J1.32 | length 24
  6 Bottom (Sig/Pwr) w20: v1(403,-119) v1(427,-119)
  other v1: 444,-102
CAM_ANA: C10.2 C11.2 C12.2 C13.2 C14.2 C15.2 C16.2 C17.2 C18.1 C19.1 C32.2 U1.1 U1.19 U1.29 U1.36 U2.1 U2.2 U2.3 | length 173.4
  1 Top (Sig/Pwr) w20: v1(-311,-74) -264.83,-74 U1.1 ; U1.36@27,240 v1(27,265) ; v1(231,126) 278.87,126 U1.29 ; U1.19 v1(333.06,-273.94)
CAM_ANA_EN: R5.1 U2.6 U4.6
CAM_ANA_NR: C36.2 U2.5
CAM_BIAS: R3.2 U1.28 | length 61.2
  1 Top (Sig/Pwr) w10: v1(223,97.73) 223,97 233.94,86.06 U1.28
CAM_CLK_EN: J1.5 R7.1 U4.4 X1.1 | length 43
  6 Bottom (Sig/Pwr) w6: v1(330,110) 344.16,124.16 364.51,124.16 J1.5
CAM_CLK_PLL_IN: R4.2 U1.25 X1.3 | length 127.5
  1 Top (Sig/Pwr) w10: U1.25 404.3,-33.94 v1(405.81,-32.43)
CAM_CLKIN_N: J1.26 R1.2 U1.23 | length 256.8
  1 Top (Sig/Pwr) w6.3: U1.23 301.77,-113.94 311.33,-104.38 323.01,-104.38 352.66,-134.03 352.66,-154.08 400.85,-202.27 423.15,-202.27 v1(425.3,-204.42)
  6 Bottom (Sig/Pwr) w6.3: v1(425.3,-204.42) 445.78,-204.42 461.22,-188.98 J1.26
CAM_CLKIN_P: J1.27 R1.1 U1.24 | length 251.2
  1 Top (Sig/Pwr) w6.3: U1.24 301.77,-73.94 311.33,-83.5 331.66,-83.5 373.54,-125.38 373.54,-145.43 406.34,-178.23 418.89,-178.23 v1(419.96,-179.29)
  6 Bottom (Sig/Pwr) w6.3: v1(419.96,-179.29) 420.73,-178.52 439.25,-178.52 444.55,-173.23 J1.27
CAM_CLKOUT_N: J1.24 U1.7 | length 793.7
  1 Top (Sig/Pwr) w6.3: U1.7 -212.91,-302.95 -203.35,-293.39 -203.35,-209.82 -144.28,-150.75 -144.28,-119.4 v1(-146.69,-117)
  6 Bottom (Sig/Pwr) w6.3: v1(-146.69,-117) -144.28,-119.4 -144.28,-144.95 -110.87,-178.36 343.14,-178.36 346.6,-174.9 364.66,-174.9 J1.24
CAM_CLKOUT_P: J1.23 U1.8 | length 757
  1 Top (Sig/Pwr) w6.3: U1.8 -172.91,-302.95 -182.47,-293.39 -182.47,-218.47 -123.4,-159.4 -123.4,-119.4 v1(-121,-117)
  6 Bottom (Sig/Pwr) w6.3: v1(-121,-117) -123.4,-119.4 -123.4,-136.3 -102.22,-157.48 J1.23
CAM_DOUT0_N: J1.21 U1.9 | length 762.5
  1 Top (Sig/Pwr) w6.3: U1.9 -132.91,-302.95 -123.35,-293.39 -123.35,-221.82 -72.28,-170.75 -72.28,-74.4 v1(-74.69,-72)
  6 Bottom (Sig/Pwr) w6.3: v1(-74.69,-72) -72.28,-74.4 -72.28,-99.95 -41.11,-131.12 343.14,-131.12 346.6,-127.66 364.66,-127.66 J1.21
CAM_DOUT0_P: J1.20 U1.10 | length 725.8
  1 Top (Sig/Pwr) w6.3: U1.10 -92.91,-302.95 -102.47,-293.39 -102.47,-230.47 -51.4,-179.4 -51.4,-74.4 v1(-49,-72)
  6 Bottom (Sig/Pwr) w6.3: v1(-49,-72) -51.4,-74.4 -51.4,-91.3 -32.46,-110.24 J1.20
CAM_DOUT1_N: J1.18 U1.11 | length 729.8
  1 Top (Sig/Pwr) w6.3: U1.11 -52.91,-302.95 -43.35,-293.39 -43.35,-228.82 -7.3,-192.77 -7.3,-33.4 v1(-9.72,-30.98)
  6 Bottom (Sig/Pwr) w6.3: v1(-9.72,-30.98) -7.3,-33.4 -7.3,-58.95 17.63,-83.88 343.14,-83.88 346.6,-80.42 364.66,-80.42 J1.18
CAM_DOUT1_P: J1.17 U1.12 | length 693
  1 Top (Sig/Pwr) w6.3: U1.12 -12.91,-302.95 -22.47,-293.39 -22.47,-237.47 13.58,-201.42 13.58,-33.42 v1(16,-31)
  6 Bottom (Sig/Pwr) w6.3: v1(16,-31) 13.58,-33.42 13.58,-50.3 26.28,-62.99 J1.17
CAM_DOUT2_N: J1.15 U1.13 | length 700
  1 Top (Sig/Pwr) w6.3: U1.13 27.09,-302.95 36.65,-293.39 36.65,-242.82 59.72,-219.75 59.72,10.6 v1(57.31,13)
  6 Bottom (Sig/Pwr) w6.3: v1(57.31,13) 59.72,10.6 59.72,-14.95 81.4,-36.63 343.14,-36.63 346.6,-33.17 364.66,-33.17 J1.15
CAM_DOUT2_P: J1.14 U1.14 | length 663.2
  1 Top (Sig/Pwr) w6.3: U1.14 67.09,-302.95 57.53,-293.39 57.53,-251.47 80.6,-228.4 80.6,10.6 v1(83,13)
  6 Bottom (Sig/Pwr) w6.3: v1(83,13) 80.6,10.6 80.6,-6.3 90.05,-15.75 J1.14
CAM_DOUT3_N: J1.12 U1.15 | length 710
  1 Top (Sig/Pwr) w6.3: v1(95.31,62) 97.72,59.6 97.72,41.28 116.15,22.85 116.65,22.36 116.65,-293.39 107.09,-302.95 U1.15
  6 Bottom (Sig/Pwr) w6.3: v1(95.31,62) 97.72,59.6 97.72,34.05 121.16,10.61 343.14,10.61 346.6,14.07 364.66,14.07 J1.12
CAM_DOUT3_P: J1.11 U1.16 | length 671.3
  1 Top (Sig/Pwr) w6.3: v1(121,62) 121.11,61.89 121.11,47.42 124.8,43.73 137.53,31 137.53,-293.39 147.09,-302.95 U1.16
  6 Bottom (Sig/Pwr) w6.3: v1(121,62) 118.6,59.6 118.6,42.7 129.81,31.5 J1.11
CAM_MON0: J1.4 U1.44 | length 768.9
  1 Top (Sig/Pwr) w10: v1@-311.97,126.03 U1.44@-264.8,126.03
  4 (GND/Sig) w10: v1(-311,126) -253.93,183.07 288.85,183.07 308.63,163.29 v1(333,163.29)
  6 Bottom (Sig/Pwr) w6: v1(333,163.29) 335.62,160.67 335.62,154.61 346.67,143.56 364.51,143.56 J1.4
CAM_PIX: C20.2 C21.2 C22.2 C23.2 C24.2 C25.2 C26.2 C27.2 C28.1 C29.1 C34.2 U1.31 U1.33 U1.38 U1.40 U3.1 U3.2 U3.3 | length 123.1
  1 Top (Sig/Pwr) w20: v1(-133,266) -133,218 U1.40 ; U1.38@-53,240 v1(-53,265) ; U1.33@147,240 v1(147,265) ; U1.31@227,240 v1(227,265)
CAM_PIX_EN: R6.1 U3.6 U4.5
CAM_PIX_NR: C37.2 U3.5
CAM_RESET: J1.3 R2.2 U1.46 | length 870.5
  1 Top (Sig/Pwr) w10: v1(-311,47) -310.53,46.53 -265.23,46.53 U1.46
  4 (GND/Sig) w10: v1(-311,47) -204.39,153.61 275.39,153.61 295,134 346.07,134 373.99,161.92 v1(406.77,161.92)
  6 Bottom (Sig/Pwr) w6: J1.3 368.17,159.31 404.16,159.31 v1(406.77,161.92)
CAM_SPI_CLK: J1.43 U1.4 | length 957.7
  1 Top (Sig/Pwr) w10: v1@-313,-193 -312.53,-193.47 -265.23,-193.47 U1.4
  4 (GND/Sig) w10: v1(-311,-193) -295,-209 125,-209 389.84,55.84 408.85,55.84 416.34,63.33 v1(418.96,63.33)
  6 Bottom (Sig/Pwr) w6: v1(418.96,63.33) v1(418.96,63.33) 434.44,78.74 J1.43
CAM_SPI_CS: J1.44 U1.47 | length 1344.5
  1 Top (Sig/Pwr) w10: v1@-311.97,6.03 U1.47@-264.8,6.03
  4 (GND/Sig) w10: v1(-311,6) -331.84,26.84 -331.84,174.63 -219.63,286.84 443.15,286.84 473.23,256.76 473.23,114.22 452.94,93.92 422.97,93.92 v1(421.12,92.07)
  6 Bottom (Sig/Pwr) w6: v1(421.12,92.07) 423.54,94.49 J1.44
CAM_SPI_MISO: J1.45 U1.3 | length 968.5
  1 Top (Sig/Pwr) w10: v1@-312.97,-153.97 U1.3@-264.8,-153.97
  4 (GND/Sig) w10: v1(-311,-154) -284,-181 111.91,-181 377.28,84.38 377.28,89.26 389.49,101.47 391.75,101.47 398.61,108.33 v1(401.23,108.33)
  6 Bottom (Sig/Pwr) w6: v1(401.23,108.33) 403.82,110.91 428.92,110.91 431.68,108.16 451.8,108.16 452.06,108.41 470.42,108.41 J1.45
CAM_SPI_MOSI: J1.47 U1.2 | length 974.1
  1 Top (Sig/Pwr) w10: v1@-313.97,-113.97 U1.2@-264.8,-113.97
  4 (GND/Sig) w10: v1(-311,-114) -272,-153 102.13,-153 392.13,137 v1(413,137)
  6 Bottom (Sig/Pwr) w6: v1(413,137) 421.84,145.84 448.44,145.84 450.72,143.56 470.42,143.56 J1.47
CAM_SYNC_N: J1.9 U1.17 | length 698.1
  1 Top (Sig/Pwr) w6.3: v1(158.31,107) 160.88,104.44 160.88,94.98 171.79,84.07 171.79,-246.79 196.65,-271.64 196.65,-293.39 187.09,-302.95 U1.17
  6 Bottom (Sig/Pwr) w6.3: v1(158.31,107) 160.72,104.6 160.72,79.05 181.91,57.86 343.14,57.86 346.6,61.32 364.66,61.32 J1.9
CAM_SYNC_P: J1.8 U1.18 | length 659.4
  1 Top (Sig/Pwr) w6.3: v1(184,107) 184,103.38 188.53,98.84 188.53,96.85 192.67,92.72 192.67,-238.14 217.53,-263 217.53,-293.39 227.09,-302.95 U1.18
  6 Bottom (Sig/Pwr) w6.3: v1(184,107) 181.6,104.6 181.6,87.7 190.56,78.74 J1.8
CAM_TRIG0: J1.1 U1.41 | length 617.3
  1 Top (Sig/Pwr) w10: U1.41 -172.46,218.37 -172.46,264.54 v1(-172,265)
  4 (GND/Sig) w10: v1(-172,265) -119.12,212.12 309.88,212.12 v1(333.02,188.98)
  6 Bottom (Sig/Pwr) w6: v1(333.02,188.98) J1.1
ENC: 
GND: C1.1 C2.1 C3.1 C4.1 C5.1 C6.1 C7.1 C8.1 C9.1 C10.1 C11.1 C12.1 C13.1 C14.1 C15.1 C16.1 C17.1 C18.2 C19.2 C20.1 C21.1 C22.1 C23.1 C24.1 C25.1 C26.1 C27.1 C28.2 C29.2 C30.1 C31.1 C32.1 C33.1 C34.1 C35.1 C36.1 C37.1 J1.2 J1.6 J1.7 J1.10 J1.13 J1.16 J1.19 J1.22 J1.25 J1.28 J1.29 J1.33 J1.36 J1.37 J1.39 J1.41 J1.42 J1.46 J1.MNT R2.1 R3.1 R4.1 U1.5 U1.20 U1.21 U1.27 U1.30 U1.32 U1.34 U1.35 U1.37 U1.39 U1.42 U1.43 U1.48 U2.4 U3.4 U4.2 X1.2 | length 952.8
  1 Top (Sig/Pwr) w20: v1(-311,-234) -264.83,-234 U1.5 ; v1(-311,-34) -264.83,-34 U1.48 ; v1(-311,166) -264.83,166 U1.43 ; v1(-238,214) U1.42@-213.66,214 ; v1(-94,265) -93.66,264.66 -93.66,218.66 U1.39 ; U1.37@-13,240 v1(-13,265) ; U1.35@67,240 v1(67,265) ; U1.34@107,240 v1(107,265) ; U1.32@187,240 v1(187,265) ; U1.30 278.94,210.94 v1(317,249)
  6 Bottom (Sig/Pwr) w9: 363.67,101.92 371.42,94.16 386.63,94.16 398.13,82.67 v1(398.13,80.62) ; J1.2@365.67,172.92 366.3,173.56 386.63,173.56 398.96,185.88 398.96,190.11 v1(401,192.16) ; J1.10 366.67,46.92 386.63,46.92 398.55,35 v1(400,35) ; J1.16@366.67,-47.08 367.15,-47.57 386.63,-47.57 395.98,-56.92 v1(398.08,-56.92) ; J1.22@367.67,-141.08 v1@400.08,-141.08 ; J1.19@368.67,-94.08 v1@401.08,-94.08 ; J1.13@368.67,-0.08 368.91,-0.33 389.44,-0.33 396.63,-7.52 v1(399.52,-7.52) ; v1(414.69,-74.63) 417.58,-74.63 421.69,-78.74 J1.33@477.16,-78.74 ; v1(415.26,14.39) 416.29,15.42 J1.39@476,15.42 ; v1(429.54,-155.46) J1.28@469.79,-155.46 ; v1(435,-32) 436.03,-30.97 468.29,-30.97 476.33,-22.92 ; v1(440.63,127) 441.32,126.31 477.11,126.31 J1.46@477.33,126.08 ; v1@444.79,56.14 477.2,56.14
  other v1: 332,-237 426.03,-230.09 225,-219 401,-142 -162,-99 -111,-96 402,-95 -91,-54 -37,-52 32,-14 -28,-13 39,30 78,36 443.87,57.06 81,83 132,86 202,123 142,125
IR_FAULT: J1.49 | length 52.4
  6 Bottom (Sig/Pwr) w6: v1(428,193) 430.62,190.38 437.24,190.38 452.57,175.06 470.42,175.06 J1.49
IR_PWM: J1.48 | length 39.4
  6 Bottom (Sig/Pwr) w6: v1(435.99,164.99) 439.69,164.99 446.84,157.84 471.88,157.84 J1.48
pads on no net: U1.45

## Polygon pours and split planes (outlines as drawn)
GND on 6 Bottom (Sig/Pwr) "6 Bottom GND Plane" (solid, shelved, pour order 0): -900,900 900,900 900,-900 -900,-900
GND on 1 Top (Sig/Pwr) "1 Top GND Plane" (solid, shelved, pour order 1): -900,900 900,900 900,-900 -900,-900
GND on 4 (GND/Sig) "4 GND Plane" (solid, shelved, pour order 2): -900,900 900,900 900,-900 -900,-900
GND on 3 (Sig/Pwr) "3 GND Plane" (solid, shelved, pour order 3): -900,900 900,900 900,-900 -900,-900
+3.3 on 5 (GND) (split plane): 466.86,481.26 470.91,479.85 474.54,477.57 477.57,474.54 479.85,470.91 481.26,466.86 481.87,461.47 481.87,-461.47 481.26,-466.86 479.85,-470.91 477.57,-474.54 474.54,-477.57 470.91,-479.85 466.86,-481.26 461.47,-481.87 -461.47,-481.87 -466.86,-481.26 -470.91,-479.85 -474.54,-477.57 -477.57,-474.54 -479.85,-470.91 -481.26,-466.86 -481.87,-461.47 -481.87,461.47 -481.26,466.86 -479.85,470.91 -477.57,474.54 -474.54,477.57 -470.91,479.85 -466.86,481.26 -461.47,481.87 461.47,481.87
GND on 2 (GND) (split plane): 466.86,481.26 470.91,479.85 474.54,477.57 477.57,474.54 479.85,470.91 481.26,466.86 481.87,461.47 481.87,-461.47 481.26,-466.86 479.85,-470.91 477.57,-474.54 474.54,-477.57 470.91,-479.85 466.86,-481.26 461.47,-481.87 -461.47,-481.87 -466.86,-481.26 -470.91,-479.85 -474.54,-477.57 -477.57,-474.54 -479.85,-470.91 -481.26,-466.86 -481.87,-461.47 -481.87,461.47 -481.26,466.86 -479.85,470.91 -477.57,474.54 -474.54,477.57 -470.91,479.85 -466.86,481.26 -461.47,481.87 461.47,481.87

## Keep-outs
Keep-Out Layer:
  lines w10: -755.63,-468.75 -754.31,-480.44 -750.43,-491.53 -744.18,-501.49 -735.86,-509.8 -725.91,-516.06 -714.81,-519.94 -703.13,-521.25 -593.75,-521.25 -577.62,-523.07 -562.3,-528.43 -548.55,-537.07 -537.07,-548.55 -528.43,-562.3 -523.07,-577.62 -521.25,-593.75 -521.25,-703.13 -519.94,-714.81 -516.05,-725.91 -509.8,-735.86 -501.49,-744.18 -491.53,-750.43 -480.44,-754.31 -468.75,-755.63 703.12,-755.63 714.8,-754.31 725.9,-750.43 735.85,-744.18 744.17,-735.86 750.42,-725.91 754.3,-714.81 755.62,-703.13 755.62,468.75 754.3,480.43 750.42,491.52 744.17,501.48 735.85,509.79 725.9,516.05 714.8,519.93 703.12,521.25 593.75,521.25 577.61,523.06 562.29,528.43 548.54,537.06 537.06,548.54 528.43,562.29 523.06,577.61 521.25,593.75 521.25,703.12 519.93,714.8 516.05,725.9 509.79,735.85 501.48,744.17 491.52,750.42 480.43,754.3 468.75,755.62 -703.13,755.62 -714.81,754.3 -725.91,750.42 -735.86,744.17 -744.18,735.85 -750.43,725.9 -754.31,714.8 -755.63,703.12 -755.63,-468.75

## Other copper
6 Bottom (Sig/Pwr):
  rectangle net GND: 350.42,90.41 382.22,114
  rectangle net GND: 456.12,43.07 488.08,66.66
  rectangle net GND: 456.24,-35.92 488.19,-12.33
  rectangle net +5: 456.24,-67.67 488.2,-44.08
  rectangle net +12_CAB: 416,-130.42 488.15,-90.42
  rectangle net GND: 456.31,-161.59 488.26,-138

## Silkscreen, mask and mechanical layers (free items; w line width, h text height)
Mechanical 1:
  circle w39.37: c0,0 r472.44

## Text inside footprints (layer, text, board x,y; h text height)
S1: Top Overlay "E488074" at -145.17,1189.15 h31.5 r90; Top Overlay "94V-0" at -182.96,1189.15 h31.5 r90
S2: Top Overlay "RoHS Pb" at -14.07,1184.04 h31.5 r90
S3: Top Overlay "©" at 153.52,1351.06 h78.74 r90
U2: Mechanical 13 "*" at -299.5,-170 h50
U3: Mechanical 13 "*" at -294.5,24 h50